# Altium PCB PCB1.PcbDoc (part 1 of 6)
Units mil, origin at the board's own origin, x right, y up, seen from the top; angles counter-clockwise.
Board outline 7480.32 x 4921.26 mil, 4 copper layers (Top Layer, GND, POWER, Bottom Layer), stack 23.756 mil thick; 513 components, 387 nets, 1792 pads, 594 vias.
Unrouted connection lines stored in the file: 21.
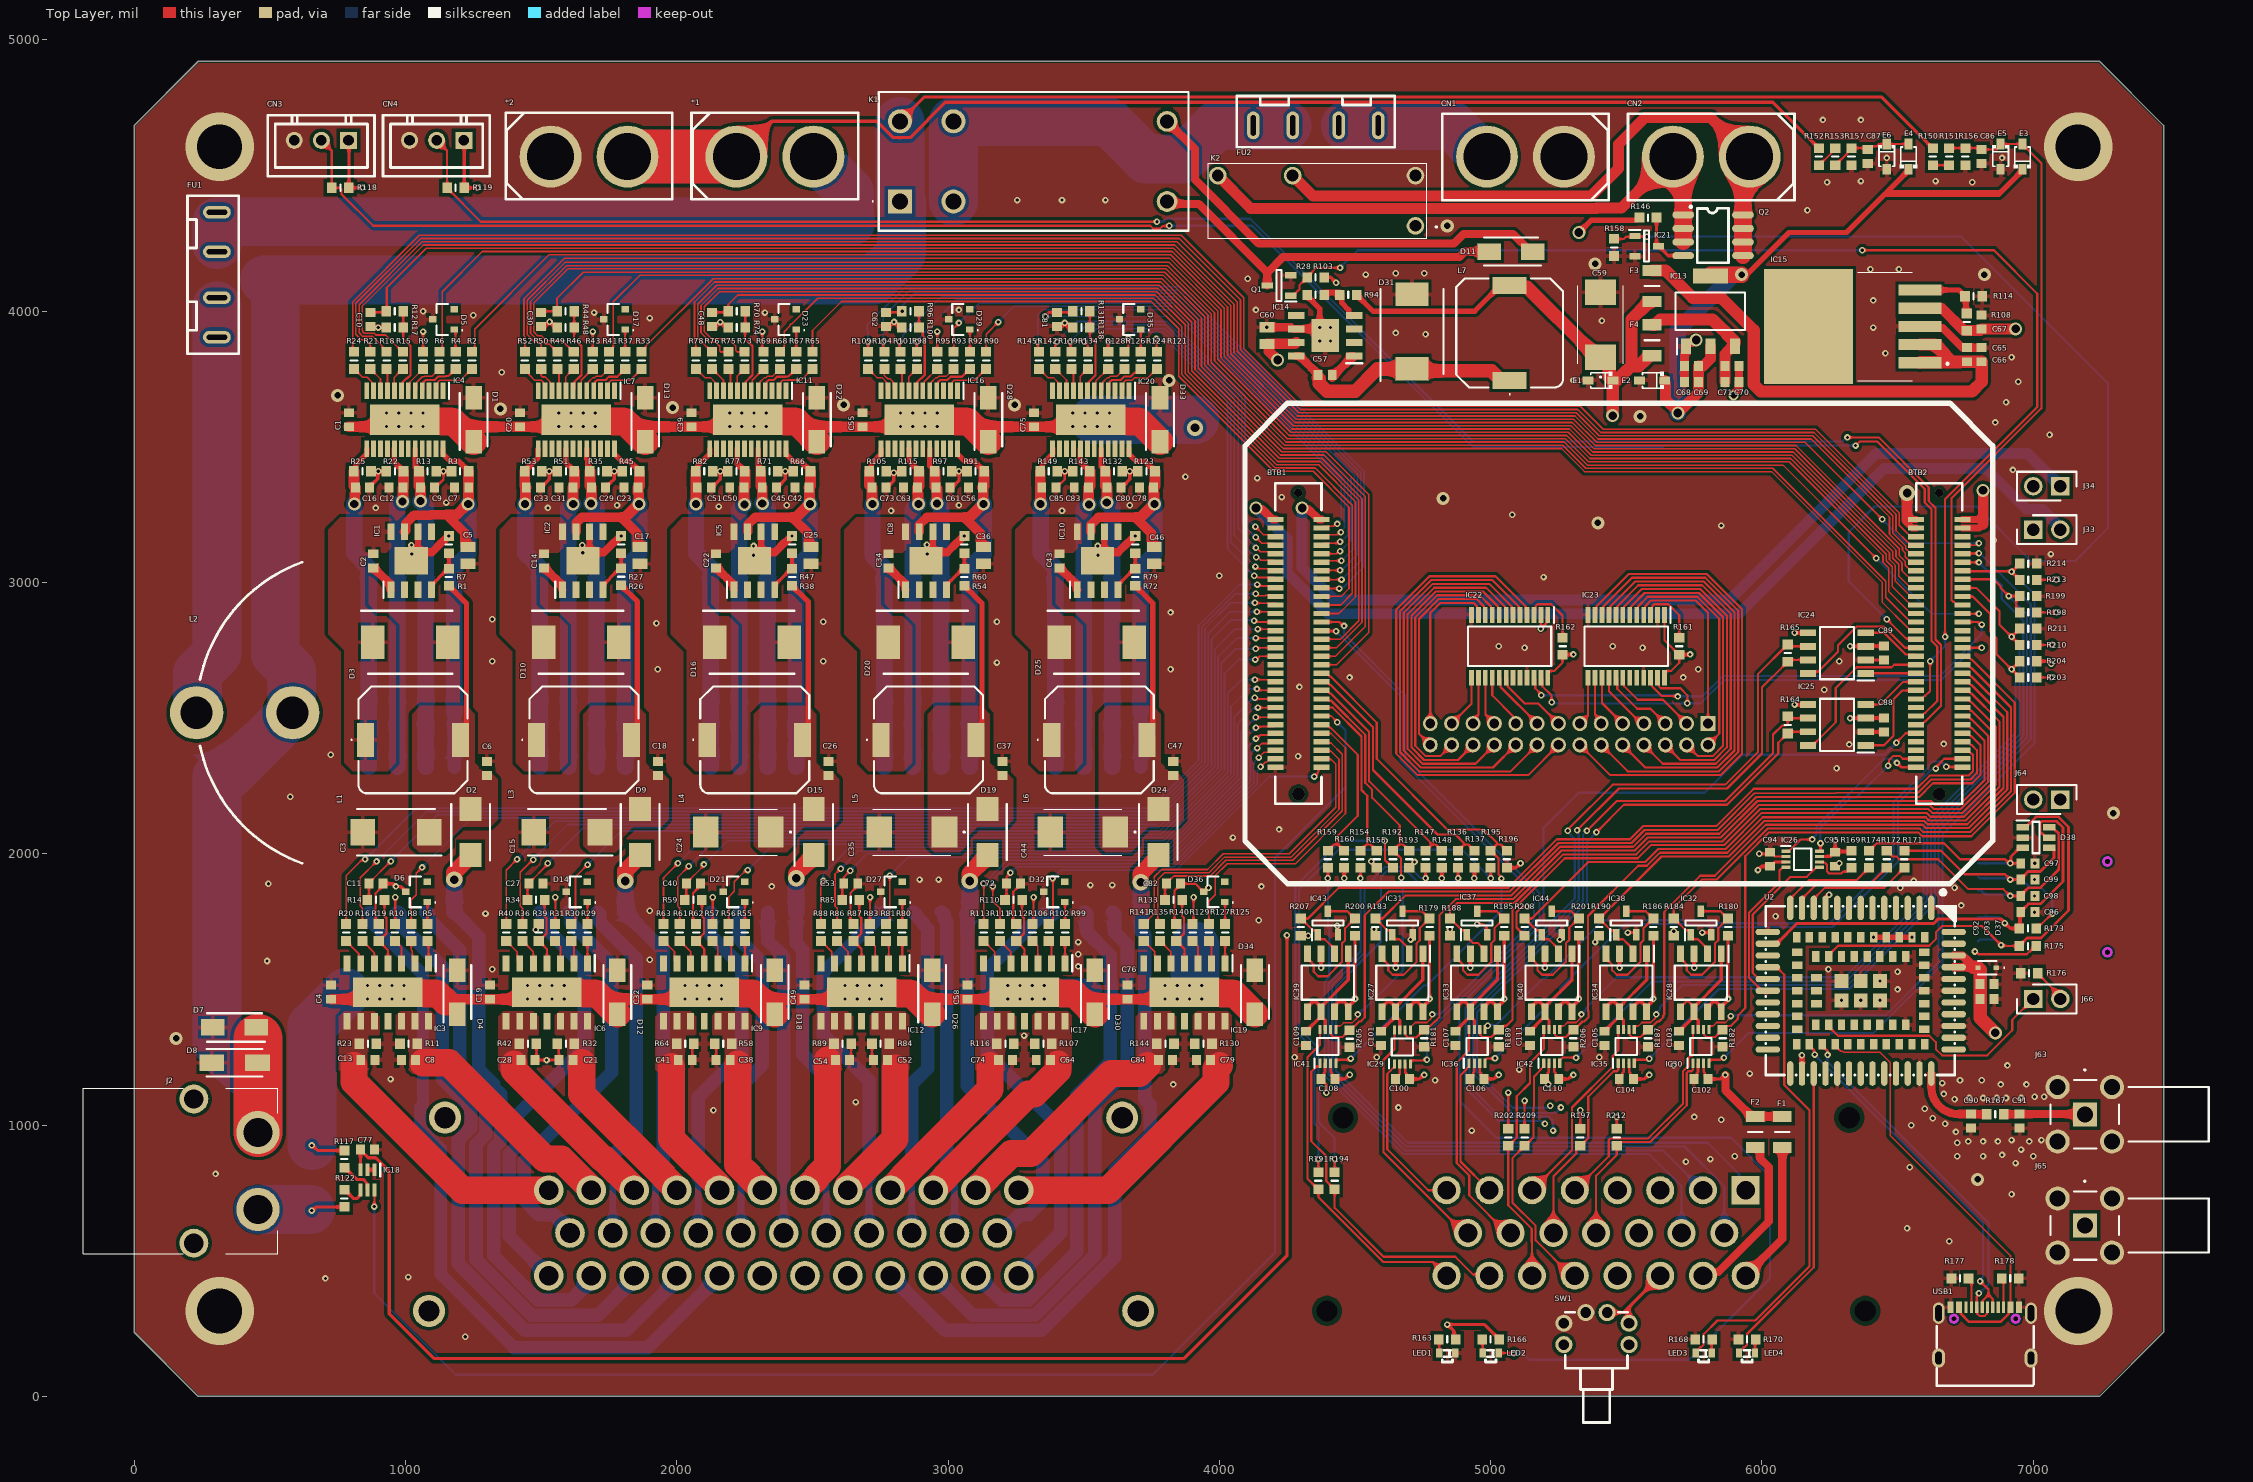
[diagram p0: Top Layer view]
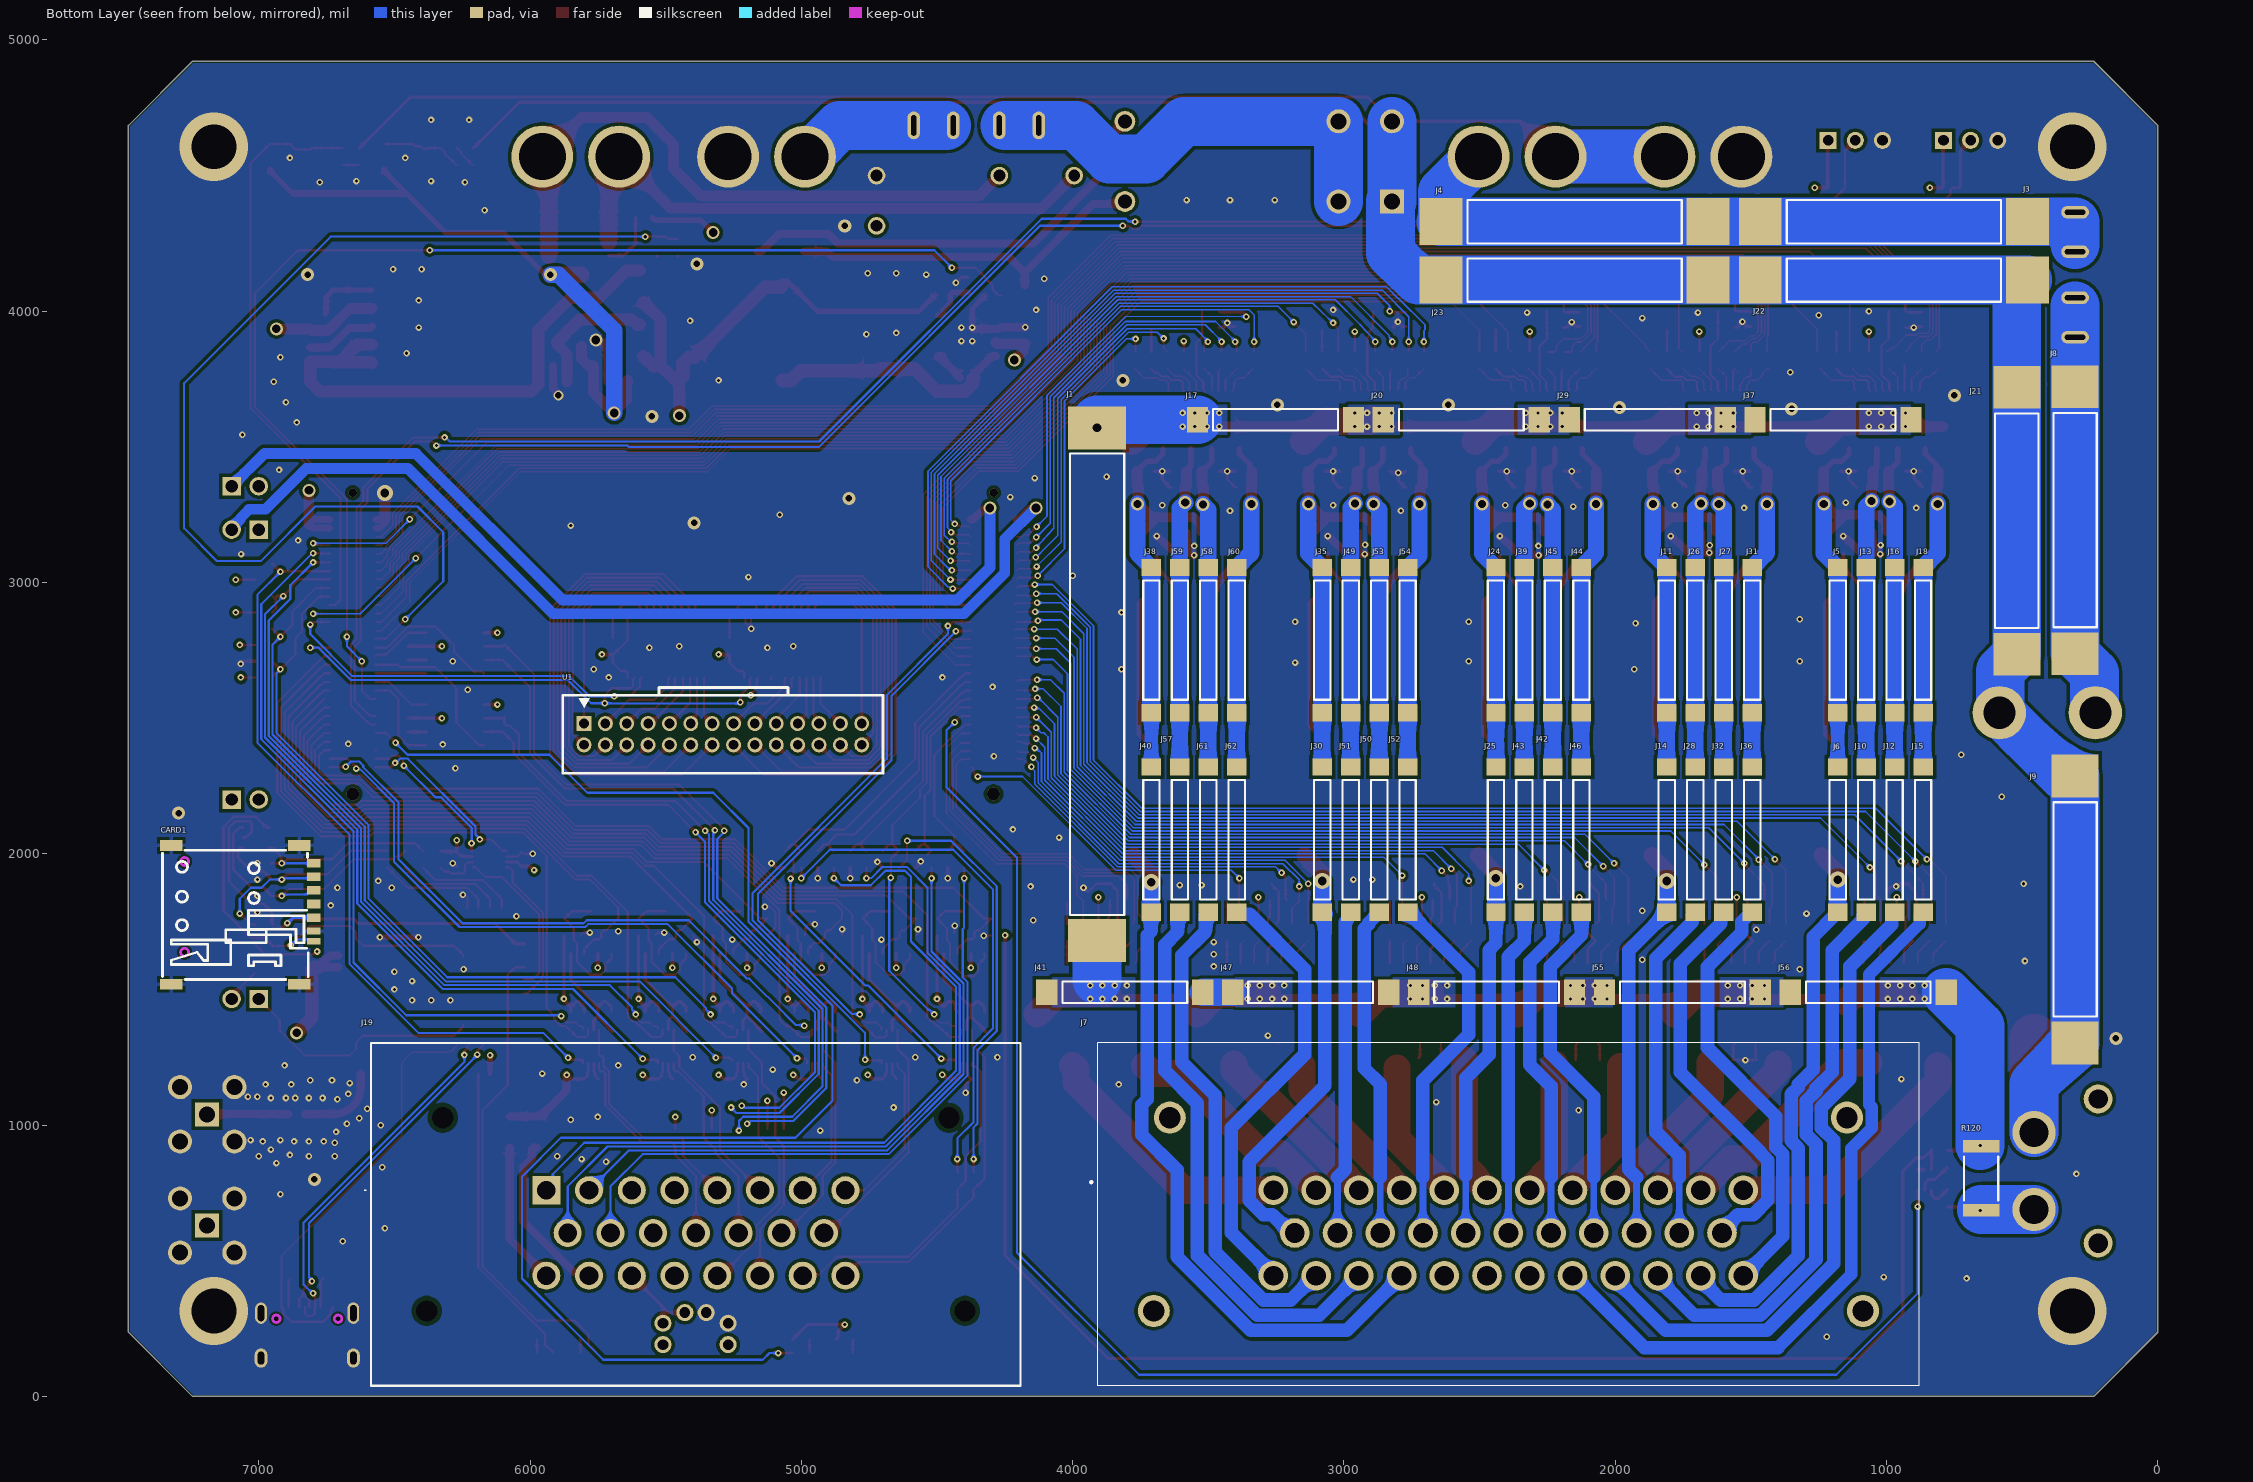
[diagram p1: Bottom Layer view, seen from below]
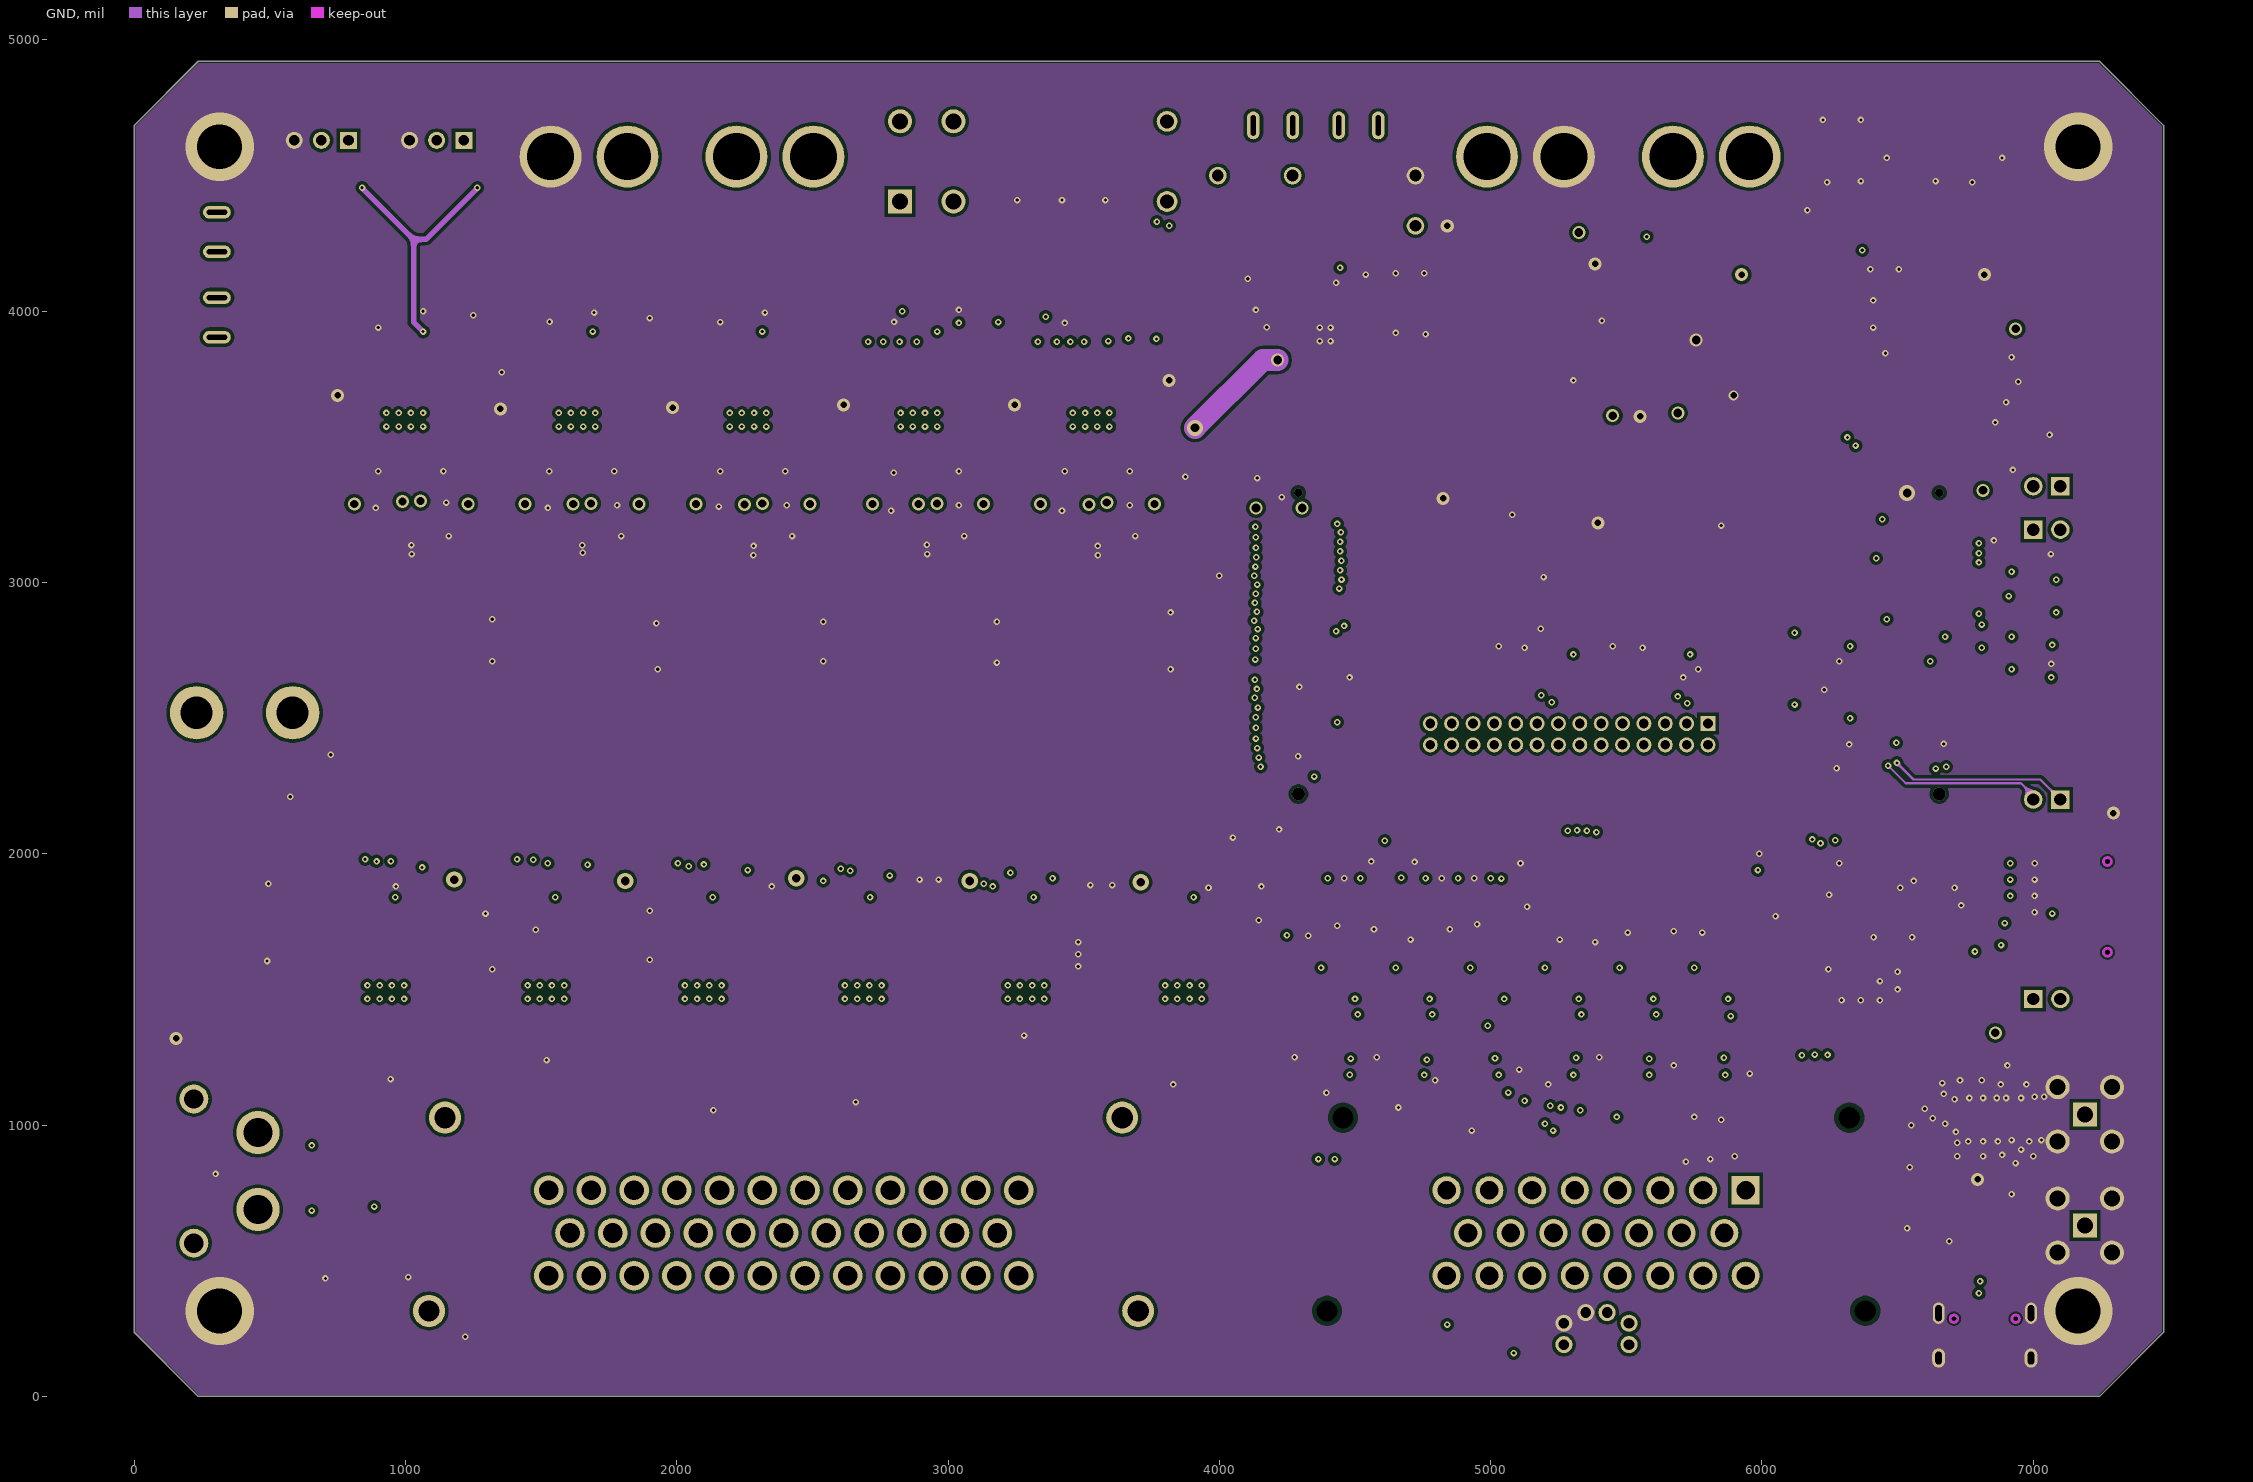
[diagram p2: GND]
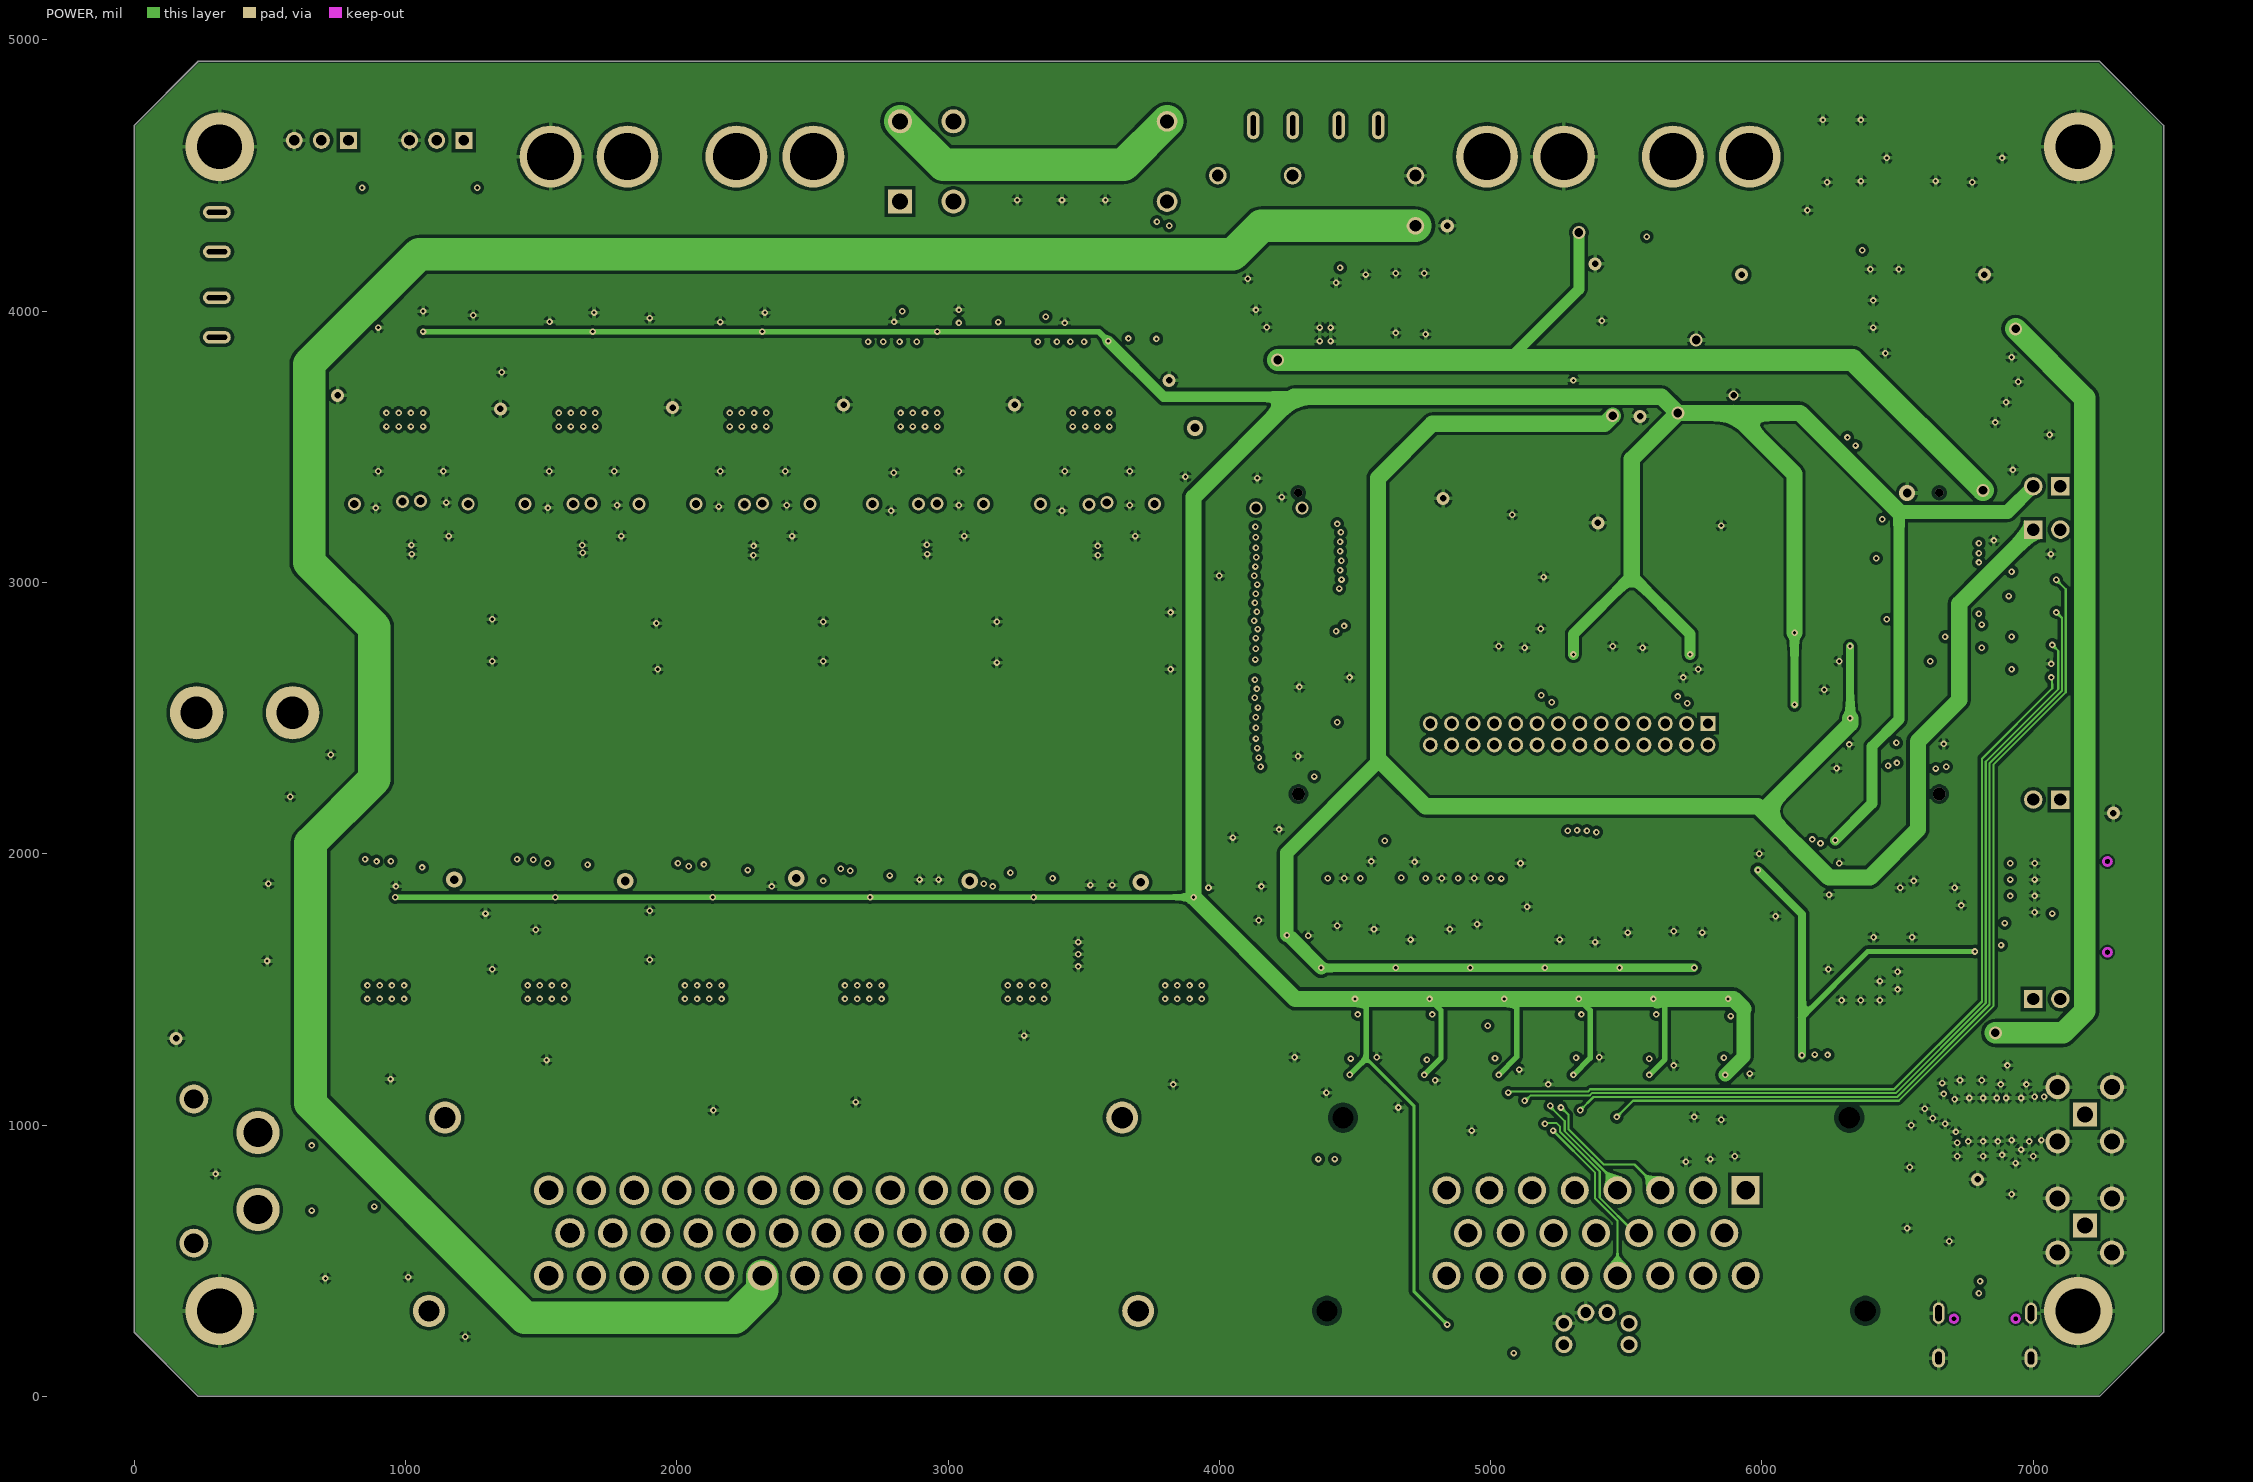
[diagram p3: POWER]
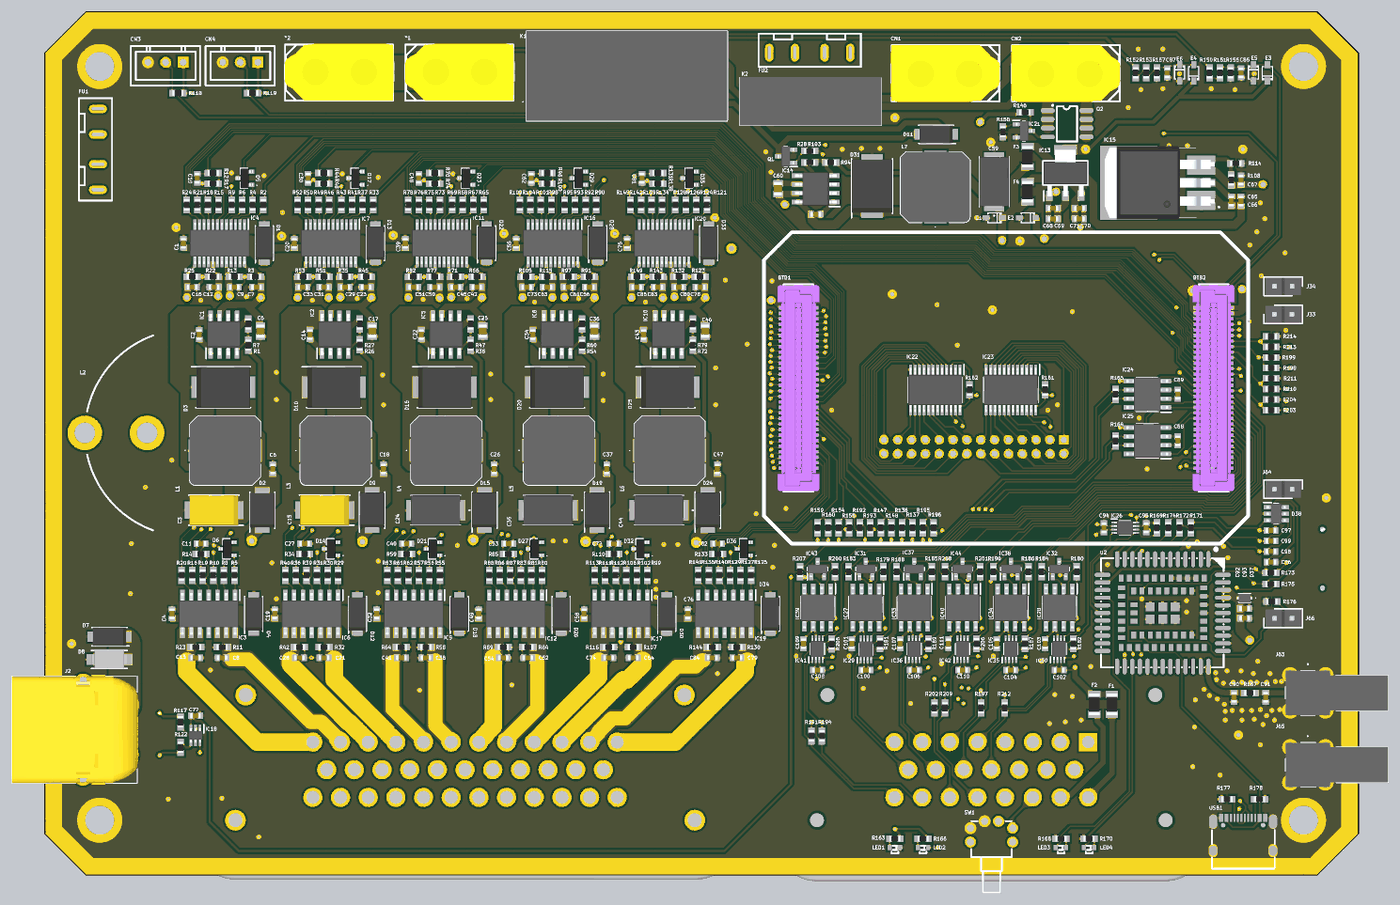
[diagram p8: 3D render of the assembled board from above, using the file's embedded part models]

## Layer stack, top to bottom
Top Solder: solder mask 0.4, Solder Resist, Dk 3.5
Top Layer: signal copper 1.4
Dielectric 2: prepreg 2.8, PP-006, Dk 4.1
GND: signal copper 1.378
Dielectric 1: dielectric 12.6, FR-4, Dk 4.8
POWER: signal copper 1.378
Dielectric 3: prepreg 2.8, PP-006, Dk 4.1
Bottom Layer: signal copper 1.4
Bottom Solder: solder mask 0.4, Solder Resist, Dk 3.5

## Board outline
0,236.22 0,4685.04 236.22,4921.26 7244.09,4921.26 7480.32,4685.04 7480.32,236.22 7244.09,0 236.22,0

## Design rules (kind name [scope] priority, off if disabled: settings)
AcuteAngle [All] p1: minimum=3.00000000000000E+0001 checktracksonly=TRUE
AssemblyTestPointUsage [All] p1 off:
AssemblyTestpoint [All] p1 off: testpointundercomponent=TRUE minsize=40 maxsize=100 preferedsize=60 minholesize=0 maxholesize=40 preferedholesize=32 testpointgrid=1 usegrid=TRUE gridtolerance=0.01 allowsidetop=TRUE allowsidebottom=TRUE
BoardOutlineClearance [All] p1: gap=6 ignorepadtopadclearanceinfootprint=FALSE
Clearance ClearanceOvRide [InComponentClass('NetTie') vs InComponentClass('NetTie')] p1: gap=12 ignorepadtopadclearanceinfootprint=TRUE except(6: Arc-Arc Arc-Track Arc-SMDPad Track-Track Track-SMDPad SMDPad-SMDPad; 10: Arc-THPad Arc-Via Track-THPad Track-Via SMDPad-THPad SMDPad-Via THPad-THPad THPad-Via Via-Via)
Clearance KeepoutOvRide [IsKeepOut vs InComponentClass('Opto')] p2: gap=0 ignorepadtopadclearanceinfootprint=TRUE
Clearance UnplatedHoleClearanceOvRide [(HoleDiameter > 0) And (PadIsPlated = 'False') AND (HoleDiameter >= PadYSize_AllLayers)] p3: gap=11.81 ignorepadtopadclearanceinfootprint=FALSE except(15.75: Arc-Hole Track-Hole SMDPad-Hole THPad-Hole Via-Hole Fill-Hole Poly-Hole Region-Hole Text-Hole)
Clearance IPC,500V,Polymer,uncoatedLead [InNetClass('450vNet')] p4: gap=59.06 ignorepadtopadclearanceinfootprint=FALSE except(11.81: Arc-Hole Track-Hole SMDPad-Hole THPad-Hole Via-Hole Fill-Hole Poly-Hole Region-Hole Text-Hole; 39.37: Arc-Arc Arc-Track Track-Track)
Clearance PowerTrace25mil [(InNetClass('PowerNet'))] p5: gap=25 ignorepadtopadclearanceinfootprint=FALSE except(6: Arc-Arc Arc-Track Arc-SMDPad Track-Track Track-SMDPad SMDPad-SMDPad; 10: Arc-THPad Arc-Via Track-THPad Track-Via SMDPad-THPad SMDPad-Via THPad-THPad THPad-Via Via-Via; 12: Arc-Text Arc-Hole Track-Text Track-Hole SMDPad-Text SMDPad-Hole THPad-Text THPad-Hole Via-Text Via-Hole Fill-Text Fill-Hole Poly-Text Poly-Hole Region-Text Region-Hole Text-Text Text-Hole)
Clearance 450V_Clearance [InNetClass('450vNet')] p6 off: gap=125.98 ignorepadtopadclearanceinfootprint=TRUE
Clearance [All] p7: gap=12 ignorepadtopadclearanceinfootprint=TRUE except(6: Arc-Arc Arc-Track Arc-SMDPad Track-Track Track-SMDPad SMDPad-SMDPad; 10: Arc-THPad Arc-Via Track-THPad Track-Via SMDPad-THPad SMDPad-Via THPad-THPad THPad-Via Via-Via)
ComponentClearance ComponentOvRide [IsNetTieComponent] p1: gap=0 collisioncheckmode=3 verticalgap=10 showdistances=FALSE
ComponentClearance "450V clearance" [InComponentClass('450vPart')] p2: gap=59.06 collisioncheckmode=3 verticalgap=100000 showdistances=FALSE
ComponentClearance [All] p3: gap=12 collisioncheckmode=3 verticalgap=10 showdistances=FALSE
Creepage CreepageOvRide [InComponentClass('NetTie') vs InComponentClass('NetTie')] p1: checkdistance=0.01
Creepage 450V_Creepage [InNetClass('450vNet') vs InNetClass('All Nets')] p2 off: checkdistance=181.1 ignoreinternallayers=FALSE
Creepage [All] p3: checkdistance=5.12
FabricationTestPointUsage [All] p1 off: valid=0 allowmultiple=FALSE
FabricationTestpoint [All] p1 off: side=3 testpointundercomponent=TRUE minsize=40 maxsize=100 preferedsize=60 minholesize=0 maxholesize=40 preferedholesize=32 testpointgrid=1 allowsidetop=TRUE allowsidebottom=TRUE usegrid=TRUE gridtolerance=0.01
Height [All] p1: minheight=0 maxheight=1574.8 prefheight=500
HoleSize HoleSizeOvRide [(HoleDiameter > 0) And (PadIsPlated = 'False') AND (HoleDiameter >= PadYSize_AllLayers)] p1: absolutevalues=TRUE maxlimit=39330.71 minlimit=7.87 maxpercent=80.000 minpercent=20.000
HoleSize [All] p2: absolutevalues=TRUE maxlimit=236.22 minlimit=7.87 maxpercent=80.000 minpercent=20.000
HoleToHoleClearance SlotOvRide [All vs (HoleDiameter > 0) And (PadIsPlated = 'False') AND (HoleDiameter >= PadYSize_AllLayers)] p1: gap=0 allowstackedmicrovias=TRUE
HoleToHoleClearance [All] p2: gap=10 allowstackedmicrovias=TRUE
MinimumAnnularRing PadMinimumAnnularRing [NOT IsVia] p1: minimumring=6
MinimumAnnularRing ViaAnnularRing [All] p2: minimumring=6
MinimumSolderMaskSliver [All] p1: minsoldermaskwidth=3
PolygonConnect PolygonConnect_47 [All vs IsNamedPolygon('Bottom')] p1: thpad.connectstyle=Direct thpad.reliefconductorwidth=10 thpad.reliefentries=4 thpad.polygonreliefangle="90 Angle" thpad.airgapwidth=10 smdpad.connectstyle=Relief smdpad.reliefconductorwidth=15 smdpad.reliefentries=4 smdpad.polygonreliefangle="90 Angle" smdpad.airgapwidth=10 via.connectstyle=Direct via.reliefconductorwidth=10 via.reliefentries=4 via.polygonreliefangle="90 Angle" via.airgapwidth=10
PolygonConnect PolygonConnect_46 [All vs IsNamedPolygon('gnd')] p2: thpad.connectstyle=Direct thpad.reliefconductorwidth=10 thpad.reliefentries=4 thpad.polygonreliefangle="90 Angle" thpad.airgapwidth=10 smdpad.connectstyle=Relief smdpad.reliefconductorwidth=15 smdpad.reliefentries=4 smdpad.polygonreliefangle="90 Angle" smdpad.airgapwidth=10 via.connectstyle=Direct via.reliefconductorwidth=10 via.reliefentries=4 via.polygonreliefangle="90 Angle" via.airgapwidth=10
PolygonConnect PolygonConnect_45 [All vs IsNamedPolygon('Top')] p3: thpad.connectstyle=Direct thpad.reliefconductorwidth=10 thpad.reliefentries=4 thpad.polygonreliefangle="90 Angle" thpad.airgapwidth=10 smdpad.connectstyle=Relief smdpad.reliefconductorwidth=15 smdpad.reliefentries=4 smdpad.polygonreliefangle="90 Angle" smdpad.airgapwidth=10 via.connectstyle=Direct via.reliefconductorwidth=10 via.reliefentries=4 via.polygonreliefangle="90 Angle" via.airgapwidth=10
PolygonConnect PolygonConnect_44 [All vs IsNamedPolygon('NONET_L04_P037')] p4: connectstyle=Direct reliefconductorwidth=10 reliefentries=4 polygonreliefangle="90 Angle" airgapwidth=10
PolygonConnect PolygonConnect_43 [All vs IsNamedPolygon('NONET_L04_P036')] p5: connectstyle=Direct reliefconductorwidth=10 reliefentries=4 polygonreliefangle="90 Angle" airgapwidth=10
PolygonConnect PolygonConnect_42 [All vs IsNamedPolygon('NONET_L04_P035')] p6: connectstyle=Direct reliefconductorwidth=10 reliefentries=4 polygonreliefangle="90 Angle" airgapwidth=10
PolygonConnect PolygonConnect_41 [All vs IsNamedPolygon('NONET_L04_P034')] p7: connectstyle=Direct reliefconductorwidth=10 reliefentries=4 polygonreliefangle="90 Angle" airgapwidth=10
PolygonConnect PolygonConnect_40 [All vs IsNamedPolygon('NONET_L04_P033')] p8: connectstyle=Direct reliefconductorwidth=10 reliefentries=4 polygonreliefangle="90 Angle" airgapwidth=10
PolygonConnect PolygonConnect_39 [All vs IsNamedPolygon('NONET_L04_P032')] p9: connectstyle=Direct reliefconductorwidth=10 reliefentries=4 polygonreliefangle="90 Angle" airgapwidth=10
PolygonConnect PolygonConnect_38 [All vs IsNamedPolygon('NONET_L04_P031')] p10: connectstyle=Direct reliefconductorwidth=10 reliefentries=4 polygonreliefangle="90 Angle" airgapwidth=10
PolygonConnect PolygonConnect_37 [All vs IsNamedPolygon('NONET_L04_P030')] p11: connectstyle=Direct reliefconductorwidth=10 reliefentries=4 polygonreliefangle="90 Angle" airgapwidth=10
PolygonConnect PolygonConnect_36 [All vs IsNamedPolygon('NONET_L04_P029')] p12: connectstyle=Direct reliefconductorwidth=10 reliefentries=4 polygonreliefangle="90 Angle" airgapwidth=10
PolygonConnect PolygonConnect_35 [All vs IsNamedPolygon('NONET_L04_P028')] p13: connectstyle=Direct reliefconductorwidth=10 reliefentries=4 polygonreliefangle="90 Angle" airgapwidth=10
PolygonConnect PolygonConnect_34 [All vs IsNamedPolygon('NONET_L04_P027')] p14: connectstyle=Direct reliefconductorwidth=10 reliefentries=4 polygonreliefangle="90 Angle" airgapwidth=10
PolygonConnect PolygonConnect_33 [All vs IsNamedPolygon('NONET_L01_P026')] p15: connectstyle=Direct reliefconductorwidth=10 reliefentries=4 polygonreliefangle="90 Angle" airgapwidth=10
PolygonConnect PolygonConnect_32 [All vs IsNamedPolygon('NONET_L01_P025')] p16: connectstyle=Direct reliefconductorwidth=10 reliefentries=4 polygonreliefangle="90 Angle" airgapwidth=10
PolygonConnect PolygonConnect_31 [All vs IsNamedPolygon('NONET_L01_P024')] p17: connectstyle=Direct reliefconductorwidth=10 reliefentries=4 polygonreliefangle="90 Angle" airgapwidth=10
PolygonConnect PolygonConnect_30 [All vs IsNamedPolygon('NONET_L01_P023')] p18: connectstyle=Direct reliefconductorwidth=10 reliefentries=4 polygonreliefangle="90 Angle" airgapwidth=10
PolygonConnect PolygonConnect_29 [All vs IsNamedPolygon('NONET_L01_P022')] p19: connectstyle=Direct reliefconductorwidth=10 reliefentries=4 polygonreliefangle="90 Angle" airgapwidth=10
PolygonConnect PolygonConnect_28 [All vs IsNamedPolygon('NONET_L01_P020')] p20: connectstyle=Direct reliefconductorwidth=10 reliefentries=4 polygonreliefangle="90 Angle" airgapwidth=10
PolygonConnect PolygonConnect_27 [All vs IsNamedPolygon('NONET_L01_P019')] p21: connectstyle=Direct reliefconductorwidth=10 reliefentries=4 polygonreliefangle="90 Angle" airgapwidth=10
PolygonConnect PolygonConnect_26 [All vs IsNamedPolygon('NONET_L01_P018')] p22: connectstyle=Direct reliefconductorwidth=10 reliefentries=4 polygonreliefangle="90 Angle" airgapwidth=10
PolygonConnect PolygonConnect_25 [All vs IsNamedPolygon('NONET_L01_P017')] p23: connectstyle=Direct reliefconductorwidth=10 reliefentries=4 polygonreliefangle="90 Angle" airgapwidth=10
PolygonConnect PolygonConnect_24 [All vs IsNamedPolygon('NONET_L01_P016')] p24: connectstyle=Direct reliefconductorwidth=10 reliefentries=4 polygonreliefangle="90 Angle" airgapwidth=10
PolygonConnect PolygonConnect_23 [All vs IsNamedPolygon('NETC3_1_L01_P013')] p25: connectstyle=Direct reliefconductorwidth=10 reliefentries=4 polygonreliefangle="90 Angle" airgapwidth=10
PolygonConnect PolygonConnect_22 [All vs IsNamedPolygon('NONET_L01_P006')] p26: connectstyle=Direct reliefconductorwidth=10 reliefentries=4 polygonreliefangle="90 Angle" airgapwidth=10
PolygonConnect PolygonConnect_21 [All vs IsNamedPolygon('NONET_L01_P011')] p27: connectstyle=Direct reliefconductorwidth=10 reliefentries=4 polygonreliefangle="90 Angle" airgapwidth=10
PolygonConnect PolygonConnect_20 [All vs IsNamedPolygon('NONET_L01_P005')] p28: connectstyle=Direct reliefconductorwidth=10 reliefentries=4 polygonreliefangle="90 Angle" airgapwidth=10
PolygonConnect PolygonConnect_19 [All vs IsNamedPolygon('NONET_L01_P010')] p29: connectstyle=Direct reliefconductorwidth=10 reliefentries=4 polygonreliefangle="90 Angle" airgapwidth=10
PolygonConnect PolygonConnect_18 [All vs IsNamedPolygon('NONET_L01_P004')] p30: connectstyle=Direct reliefconductorwidth=10 reliefentries=4 polygonreliefangle="90 Angle" airgapwidth=10
PolygonConnect PolygonConnect_17 [All vs IsNamedPolygon('NONET_L01_P009')] p31: connectstyle=Direct reliefconductorwidth=10 reliefentries=4 polygonreliefangle="90 Angle" airgapwidth=10
PolygonConnect PolygonConnect_16 [All vs IsNamedPolygon('NONET_L01_P003')] p32: connectstyle=Direct reliefconductorwidth=10 reliefentries=4 polygonreliefangle="90 Angle" airgapwidth=10
PolygonConnect PolygonConnect_15 [All vs IsNamedPolygon('NONET_L01_P008')] p33: connectstyle=Direct reliefconductorwidth=10 reliefentries=4 polygonreliefangle="90 Angle" airgapwidth=10
PolygonConnect PolygonConnect_14 [All vs IsNamedPolygon('NONET_L01_P002')] p34: connectstyle=Direct reliefconductorwidth=10 reliefentries=4 polygonreliefangle="90 Angle" airgapwidth=10
PolygonConnect PolygonConnect_13 [All vs IsNamedPolygon('NONET_L01_P007')] p35: connectstyle=Direct reliefconductorwidth=10 reliefentries=4 polygonreliefangle="90 Angle" airgapwidth=10
PolygonConnect PolygonConnect_12 [All vs IsNamedPolygon('NONET_L01_P000')] p36: connectstyle=Direct reliefconductorwidth=10 reliefentries=4 polygonreliefangle="90 Angle" airgapwidth=10
PolygonConnect PolygonConnect_11 [All vs IsNamedPolygon('NONET_L01_P001')] p37: connectstyle=Direct reliefconductorwidth=10 reliefentries=4 polygonreliefangle="90 Angle" airgapwidth=10
PolygonConnect PolygonConnect_10 [All vs IsNamedPolygon('GND_L06_P017')] p38: thpad.connectstyle=Relief thpad.reliefconductorwidth=10 thpad.reliefentries=4 thpad.polygonreliefangle="90 Angle" thpad.airgapwidth=10 smdpad.connectstyle=Relief smdpad.reliefconductorwidth=10 smdpad.reliefentries=4 smdpad.polygonreliefangle="90 Angle" smdpad.airgapwidth=10 via.connectstyle=Direct via.reliefconductorwidth=10 via.reliefentries=4 via.polygonreliefangle="90 Angle" via.airgapwidth=10
PolygonConnect PolygonConnect_9 [All vs IsNamedPolygon('GND_L05_P012')] p39: thpad.connectstyle=Relief thpad.reliefconductorwidth=15 thpad.reliefentries=4 thpad.polygonreliefangle="90 Angle" thpad.airgapwidth=10 smdpad.connectstyle=Relief smdpad.reliefconductorwidth=15 smdpad.reliefentries=4 smdpad.polygonreliefangle="90 Angle" smdpad.airgapwidth=10 via.connectstyle=Direct via.reliefconductorwidth=15 via.reliefentries=4 via.polygonreliefangle="90 Angle" via.airgapwidth=10
PolygonConnect PolygonConnect_8 [All vs IsNamedPolygon('GND_L02_P011')] p40: thpad.connectstyle=Relief thpad.reliefconductorwidth=15 thpad.reliefentries=4 thpad.polygonreliefangle="90 Angle" thpad.airgapwidth=10 smdpad.connectstyle=Relief smdpad.reliefconductorwidth=15 smdpad.reliefentries=4 smdpad.polygonreliefangle="90 Angle" smdpad.airgapwidth=10 via.connectstyle=Direct via.reliefconductorwidth=15 via.reliefentries=4 via.polygonreliefangle="90 Angle" via.airgapwidth=10
PolygonConnect PolygonConnect_7 [All vs IsNamedPolygon('GND_L01_P013')] p41: thpad.connectstyle=Relief thpad.reliefconductorwidth=15 thpad.reliefentries=4 thpad.polygonreliefangle="90 Angle" thpad.airgapwidth=10 smdpad.connectstyle=Relief smdpad.reliefconductorwidth=15 smdpad.reliefentries=4 smdpad.polygonreliefangle="90 Angle" smdpad.airgapwidth=10 via.connectstyle=Direct via.reliefconductorwidth=15 via.reliefentries=4 via.polygonreliefangle="90 Angle" via.airgapwidth=10
PolygonConnect PolygonConnect_6 [All vs IsNamedPolygon('NETIC2_47_L01_P009')] p42: connectstyle=Direct reliefconductorwidth=10 reliefentries=4 polygonreliefangle="90 Angle" airgapwidth=10
PolygonConnect PolygonConnect_5 [All vs IsNamedPolygon('NETIC2_34_L01_P010')] p43: connectstyle=Direct reliefconductorwidth=10 reliefentries=4 polygonreliefangle="90 Angle" airgapwidth=10
PolygonConnect PolygonConnect_4 [All vs IsNamedPolygon('NETD3_2_L01_P000')] p44: connectstyle=Direct reliefconductorwidth=10 reliefentries=4 polygonreliefangle="90 Angle" airgapwidth=10
PolygonConnect PolygonConnect_3 [All vs IsNamedPolygon('NETD1_2_L01_P005')] p45: connectstyle=Direct reliefconductorwidth=10 reliefentries=4 polygonreliefangle="90 Angle" airgapwidth=10
PolygonConnect PolygonConnect_2 [All vs IsNamedPolygon('NETC7_1_L01_P004')] p46: connectstyle=Direct reliefconductorwidth=10 reliefentries=4 polygonreliefangle="90 Angle" airgapwidth=10
PolygonConnect PolygonConnect_1 [All vs IsNamedPolygon('NETC6_1_L01_P007')] p47: connectstyle=Direct reliefconductorwidth=10 reliefentries=4 polygonreliefangle="90 Angle" airgapwidth=10
PolygonConnect [All] p48: connectstyle=Relief reliefconductorwidth=15 reliefentries=4 polygonreliefangle="90 Angle" airgapwidth=10
RoutingVias [All] p1: holewidth=11.81 width=787.4 viastyle="Through Hole" minholewidth=7.48 minwidth=16 maxholewidth=78.74 maxwidth=120
SMDEntry [All] p1 off: side=TRUE corner=TRUE anyangle=FALSE
SMDToCorner [All] p1 off: distance=30000
ShortCircuit ShortCircuitOvRide [InComponentClass('NetTie') OR((HoleDiameter > 0) And (PadIsPlated = 'False') AND (HoleDiameter >= PadYSize_AllLayers)) vs InComponentClass('NetTie') OR ((HoleDiameter > 0) And (PadIsPlated = 'False') AND (HoleDiameter >= PadYSize_AllLayers))] p1: allowed=TRUE
ShortCircuit [All] p2: allowed=FALSE
SilkToSilkClearance [All] p1: silktosilkclearance=1
SilkToSolderMaskClearance [IsPad] p1: minsilkscreentomaskgap=0 clearancetoexposedcopper=TRUE
SolderMaskExpansion [All] p1: expansion=2 istentingtop=FALSE
UnRoutedNet [All] p1: checkbadconnections=TRUE
Width [All] p1: maxlimit=200 minlimit=4 preferedwidth=10
17 further rules are at their usual default settings.

## Classes and differential pairs
component class Sheet4: C100 C101 C102 C103 C104 C105 C106 C107 C108 C109 C110 C111 IC27 IC28 IC29 IC30 IC31 IC32 IC33 IC34 IC35 IC36 IC37 IC38 IC39 IC40 IC41 IC42 IC43 IC44 R179 R180 R181 R182 R183 R184 R185 R186 R187 R188 R189 R190 R191 R192 R193 R194 R195 R196 R197 R198 R199 R200 R201 R202 R203 R204 R205 R206 R207 R208 R209 R210 R211 R212 R213 R214
component class Sheet2: C90 C91 C92 C93 C94 C95 C96 C97 C98 C99 CARD1 D37 D38 IC26 J63 J64 J65 J66 LED3 LED4 R167 R168 R169 R170 R171 R172 R173 R174 R175 R176 R177 R178 U2 USB1
component class Sheet1: *1 *2 BTB1 BTB2 C1 C2 C3 C4 C5 C6 C7 C8 C9 C10 C11 C12 C13 C14 C15 C16 C17 C18 C19 C20 C21 C22 C23 C24 C25 C26 C27 C28 C29 C30 C31 C32 C33 C34 C35 C36 C37 C38 C39 C40 C41 C42 C43 C44 C45 C46 C47 C48 C49 C50 C51 C52 C53 C54 C55 C56 C57 C58 C59 C60 C61 C62 C63 C64 C65 C66 C67 C68 C69 C70 C71 C72 C73 C74 C75 C76 C77 C78 C79 C80 C81 C82 C83 C84 C85 C86 C87 C88 C89 CN1 CN2 CN3 CN4 D1 D2 D3 D4 D5 D6 D7 D8 D9 D10 D11 D12 D13 D14 D15 D16 D17 D18 D19 D20 D21 D22 D23 D24 D25 D26 D27 D28 D29 D30 D31 D32 D33 D34 D35 D36 E1 E2 E3 E4 E5 E6 F1 F2 F3 F4 FU1 FU2 IC1 IC2 IC3 IC4 IC5 IC6 IC7 IC8 IC9 IC10 IC11 IC12 IC13 IC14 IC15 IC16 IC17 IC18 IC19 IC20 IC21 IC22 IC23 IC24 IC25 J1 J2 J3 J4 J5 J6 J7 J8 J9 J10 J11 J12 J13 J14 J15 J16 J17 J18 J19 J20 J21 J22 J23 J24 J25 J26 J27 J28 J29 J30 J31 J32 J33 J34 J35 J36 J37 J38 J39 J40 J41 J42 J43 J44 J45 J46 J47 J48 J49 J50 J51 J52 J53 J54 J55 J56 J57 J58 J59 J60 J61 J62 K1 K2 L1 L2 L3 L4 L5 L6 L7 LED1 LED2 Q1 Q2 R1 R2 R3 R4 R5 R6 R7 R8 R9 R10 R11 R12 R13 R14 R15 R16 R17 R18 R19 R20 R21 R22 R23 R24 R25 R26 R27 R28 R29 R30 R31 R32 R33 R34 R35 R36 R37 R38 R39 R40 R41 R42 R43 R44 R45 R46 R47 R48 R49 R50 R51 R52 R53 R54 R55 R56 R57 R58 R59 R60 R61 R62 R63 R64 R65 R66 R67 R68 R69 R70 R71 R72 R73 R74 R75 R76 R77 R78 R79 R80 R81 R82 R83 R84 R85 R86 R87 R88 R89 R90 R91 R92 R93 R94 R95 R96 R97 R98 R99 R100 R101 R102 R103 R104 R105 R106 R107 R108 R109 R110 R111 R112 R113 R114 R115 R116 R117 R118 R119 R120 R121 R122 R123 R124 R125 R126 R127 R128 R129 R130 R131 R132 R133 R134 R135 R136 R137 R138 R139 R140 R141 R142 R143 R144 R145 R146 R147 R148 R149 R150 R151 R152 R153 R154 R155 R156 R157 R158 R159 R160 R161 R162 R163 R164 R165 R166 SW1 U1

## Components (designator, comment, footprint, x,y, rotation, side; value= is the part's Value field where it differs from the comment)
*1 "XT60-NOMAL" AMASS_XT60_NOMAL 2220,4570 r0 top
*2 "XT60-NOMAL" AMASS_XT60_NOMAL 1535,4570 r0 top
BTB1 "BTB_0.8mm_60Pin_Mother" BTB_0.8MM_60PIN_M 4291.34,2775.59 r180 top
BTB2 "BTB_0.8mm_60Pin_Mother" BTB_0.8MM_60PIN_M 6653.54,2775.59 r180 top
C1 "100nF" CAPC1608X90N 791.26,3600 r90 top
C2 "10nF" CAPC1608X90N 881.26,3080 r90 top
C3 "TAJE337M016RNJ" CAPPM7344X430N 965,2080 r180 top
C4 "100nF" CAPC1608X90N 726.26,1490 r90 top
C5 "22uF" CAPC2012X95N 1230,3100 r90 top
C6 "100nF" CAPC1608X90N 1300,2315 r270 top
C7 "10nF" CAPC1608X90N 1207.24,3350 r0 top
C8 "10nF" CAPC1608X90N 1011.26,1240 r0 top
C9 "10nF" CAPC1608X90N 1081.26,3350 r180 top
C10 "100pF" CAPC1608X90N 870.28,3970 r90 top
C11 "100pF" CAPC1608X90N 891.26,1890 r180 top
C12 "10nF" CAPC1608X90N 965.28,3350 r0 top
C13 "10nF" CAPC1608X90N 861.26,1240 r180 top
C14 "10nF" CAPC1608X90N 1511.26,3080 r90 top
C15 "TAJE337M016RNJ" CAPPM7344X430N 1595,2080 r180 top
C16 "10nF" CAPC1608X90N 841.26,3350 r180 top
C17 "22uF" CAPC2012X95N 1865,3100 r90 top
C18 "100nF" CAPC1608X90N 1930,2315 r270 top
C19 "100nF" CAPC1608X90N 1311.26,1490 r90 top
C20 "100nF" CAPC1608X90N 1422.51,3600 r90 top
C21 "10nF" CAPC1608X90N 1591.26,1240 r0 top
C22 "10nF" CAPC1608X90N 2145,3080 r90 top
C23 "10nF" CAPC1608X90N 1831.26,3350 r0 top
C24 "10TPB330M" POSCAP_D12_D15_D15E_D2E_D2_D3L_D4 2226.55,2080 r180 top
C25 "22uF" CAPC2012X95N 2495,3100 r90 top
C26 "100nF" CAPC1608X90N 2560,2315 r270 top
C27 "100pF" CAPC1608X90N 1481.26,1890 r180 top
C28 "10nF" CAPC1608X90N 1451.26,1240 r180 top
C29 "10nF" CAPC1608X90N 1711.26,3350 r180 top
C30 "100pF" CAPC1608X90N 1500.28,3970 r90 top
C31 "10nF" CAPC1608X90N 1591.26,3350 r0 top
C32 "100nF" CAPC1608X90N 1891.26,1490 r90 top
C33 "10nF" CAPC1608X90N 1471.26,3350 r180 top
C34 "10nF" CAPC1608X90N 2780,3080 r90 top
C35 "10TPB330M" POSCAP_D12_D15_D15E_D2E_D2_D3L_D4 2866.55,2080 r180 top
C36 "22uF" CAPC2012X95N 3130,3100 r90 top
C37 "100nF" CAPC1608X90N 3200,2315 r270 top
C38 "10nF" CAPC1608X90N 2171.26,1240 r0 top
C39 "100nF" CAPC1608X90N 2053.76,3600 r90 top
C40 "100pF" CAPC1608X90N 2061.26,1890 r180 top
C41 "10nF" CAPC1608X90N 2031.26,1240 r180 top
C42 "10nF" CAPC1608X90N 2461.26,3350 r0 top
C43 "10nF" CAPC1608X90N 3410,3080 r90 top
C44 "10TPB330M" POSCAP_D12_D15_D15E_D2E_D2_D3L_D4 3496.55,2080 r180 top
C45 "10nF" CAPC1608X90N 2341.26,3350 r180 top
C46 "22uF" CAPC2012X95N 3760,3100 r90 top
C47 "100nF" CAPC1608X90N 3830,2315 r270 top
C48 "100pF" CAPC1608X90N 2130.28,3970 r90 top
C49 "100nF" CAPC1608X90N 2471.26,1490 r90 top
C50 "10nF" CAPC1608X90N 2221.26,3350 r0 top
C51 "10nF" CAPC1608X90N 2101.26,3350 r180 top
C52 "10nF" CAPC1608X90N 2751.26,1240 r0 top
C53 "100pF" CAPC1608X90N 2641.26,1890 r180 top
C54 "10nF" CAPC1608X90N 2611.26,1240 r180 top
C55 "100nF" CAPC1608X90N 2685.01,3600 r90 top
C56 "10nF" CAPC1608X90N 3101.26,3350 r0 top
C57 "10nF" CAPC1608X90N 4390,3765 r180 top
C58 "100nF" CAPC1608X90N 3071.26,1490 r90 top
C59 "10TPB330M" POSCAP_D12_D15_D15E_D2E_D2_D3L_D4 5405,3950 r90 top
C60 "22uF" CAPC2012X95N 4175,3910 r270 top
C61 "10nF" CAPC1608X90N 2981.26,3350 r180 top
C62 "100pF" CAPC1608X90N 2771.26,3970 r90 top
C63 "10nF" CAPC1608X90N 2861.26,3350 r0 top
C64 "10nF" CAPC1608X90N 3351.26,1240 r0 top
C65 "100nF" CAPC1608X90N 6755,3840 r270 top
C66 "33pF" CAPC1608X90N 6810,3840 r270 top
C67 "100nF" CAPC1608X90N 6810,3960 r270 top
C68 "10uF" CAPC1608X90N 5740,3798.74 r0 top
C69 "100nF" CAPC1608X90N 5740,3738.74 r0 top
C70 "10uF" CAPC1608X90N 5890,3738.74 r180 top
C71 "100nF" CAPC1608X90N 5890,3798.74 r180 top
C72 "100pF" CAPC1608X90N 3241.26,1890 r180 top
C73 "10nF" CAPC1608X90N 2745.28,3350 r180 top
C74 "10nF" CAPC1608X90N 3211.26,1240 r180 top
C75 "100nF" CAPC1608X90N 3316.26,3600 r90 top
C76 "100nF" CAPC1608X90N 3661.26,1490 r90 top
C77 "C0603" CAPC1608X90N 860,910 r180 top
C78 "10nF" CAPC1608X90N 3731.26,3350 r0 top
C79 "10nF" CAPC1608X90N 3941.26,1240 r0 top
C80 "10nF" CAPC1608X90N 3611.26,3350 r180 top
C81 "100pF" CAPC1608X90N 3401.26,3970 r90 top
C82 "100pF" CAPC1608X90N 3831.26,1890 r180 top
C83 "10nF" CAPC1608X90N 3491.26,3350 r0 top
C84 "10nF" CAPC1608X90N 3801.26,1240 r180 top
C85 "10nF" CAPC1608X90N 3371.26,3350 r180 top
C86 "100nF" CAPC1608X90N 6810,4570 r90 top
C87 "100nF" CAPC1608X90N 6390,4570 r90 top
C88 "100nF" CAPC1608X90N 6450,2475 r270 top
C89 "100nF" CAPC1608X90N 6450,2740 r270 top
C90 "NC" CAPC1608X90N 6770,1015 r90 top
C91 "NC" CAPC1608X90N 6950,1015 r90 top
C92 "100nF" CAPC1608X90N 6830,1465 r180 top
C93 "100nF" CAPC1608X90N 6830,1520 r180 top
C94 "100nF" CAPC1608X90N 6030,1980 r90 top
C95 "100nF" CAPC1608X90N 6270,1980 r270 top
C96 "100nF" CAPC1608X90N 6980,1785 r180 top
C97 "33pF" CAPC1608X90N 6980,1965 r0 top
C98 "33pF" CAPC1608X90N 6980,1845 r0 top
C99 "33pF" CAPC1608X90N 6980,1905 r0 top
C100 "100nF" CAPC1608X90N 4675,1170 r180 top
C101 "100nF" CAPC1608X90N 4595,1320 r270 top
C102 "100nF" CAPC1608X90N 5775,1170 r180 top
C103 "100nF" CAPC1608X90N 5695,1320 r270 top
C104 "100nF" CAPC1608X90N 5500,1170 r180 top
C105 "100nF" CAPC1608X90N 5420,1320 r270 top
C106 "100nF" CAPC1608X90N 4950,1170 r180 top
C107 "100nF" CAPC1608X90N 4870,1320 r270 top
C108 "100nF" CAPC1608X90N 4400,1170 r180 top
C109 "100nF" CAPC1608X90N 4320,1320 r270 top
C110 "100nF" CAPC1608X90N 5225,1170 r180 top
C111 "100nF" CAPC1608X90N 5145,1320 r270 top
CARD1 "SMN-303" SIM-SMD_SMN-303 7060,1775 r270 bottom
CN1 "XT60-NOMAL" AMASS_XT60_NOMAL 5270,4570 r180 top
CN2 "XT60-NOMAL" AMASS_XT60_NOMAL 5955,4570 r180 top
CN3 "ZX-XH2.54-3PZZ" CONN-TH_3P-P2.54_2501S-3P 690,4630 r180 top
CN4 "ZX-XH2.54-3PZZ" CONN-TH_3P-P2.54_2501S-3P 1115,4629.99 r180 top
D1 "SMAJ58CA" DIOM5026X229N 1251.26,3600 r90 top
D2 "SS54B" DIOM5336X244N 1240,2080 r90 top
D3 "B540C-13-F" DIOM7959X250N 1017.7,2780 r0 top
D4 "SMAJ58CA" DIOM5026X229N 1191.26,1490 r90 top
D5 "BAS21,215" BAS21215 1140.28,3970 r90 top
D6 "BAS21,215" BAS21215 1041.26,1860 r90 top
D7 "M7" DIOM5127X250N 370,1360 r180 top
D8 "SMAJ28CA" DIONM5226X262N 370,1230 r0 top
D9 "SS54B" DIOM5336X244N 1865,2080.35 r90 top
D10 "B540C-13-F" DIOM7959X250N 1647.7,2780 r0 top
D11 "SS34A" DIOM5026X262N 5075,4220 r180 top
D12 "SMAJ58CA" DIOM5026X229N 1781.26,1490 r90 top
D13 "SMAJ58CA" DIOM5026X229N 1883.76,3600 r90 top
D14 "BAS21,215" BAS21215 1631.26,1860 r90 top
D15 "SS54B" DIOM5336X244N 2505,2080.35 r90 top
D16 "B540C-13-F" DIOM7959X250N 2277.7,2780 r0 top
D17 "BAS21,215" BAS21215 1770.28,3970 r90 top
D18 "SMAJ58CA" DIOM5026X229N 2361.26,1490 r90 top
D19 "SS54B" DIOM5336X244N 3145,2080.35 r90 top
D20 "B540C-13-F" DIOM7959X250N 2917.7,2780 r0 top
D21 "BAS21,215" BAS21215 2211.26,1860 r90 top
D22 "SMAJ58CA" DIOM5026X229N 2516.26,3600 r90 top
D23 "BAS21,215" BAS21215 2400.28,3970 r90 top
D24 "SS54B" DIOM5336X244N 3775,2080.35 r90 top
D25 "B540C-13-F" DIOM7959X250N 3547.7,2780 r0 top
D26 "SMAJ58CA" DIOM5026X229N 2941.26,1490 r90 top
D27 "BAS21,215" BAS21215 2791.26,1860 r90 top
D28 "SMAJ58CA" DIOM5026X229N 3148.76,3600 r90 top
D29 "BAS21,215" BAS21215 3041.26,3970 r90 top
D30 "SMAJ58CA" DIOM5026X229N 3541.26,1490 r90 top
D31 "B540C-13-F" DIOM7959X250N 4710,3925 r90 top
D32 "BAS21,215" BAS21215 3391.26,1860 r90 top
D33 "SMAJ58CA" DIOM5026X229N 3781.26,3600 r90 top
D34 "SMAJ58CA" DIOM5026X229N 4131.26,1490 r90 top
D35 "BAS21,215" BAS21215 3671.26,3970 r90 top
D36 "BAS21,215" BAS21215 3981.26,1860 r90 top
D37 "WS4.5D3HV" WS45D3HV 6830,1580 r180 top
D38 "SRV05-4.TCT" SOT95P280X145-6N 7010,2060 r0 top
E1 "CESD5V0D3 ZA" SOD-323_L1.8-W1.3-LS2.5-RD 5405,3745 r180 top
E2 "CESD3V3D3 YU" SOD-323_L1.8-W1.3-LS2.5-RD 5595,3745 r180 top
E3 "CESD3V3D3 YU" SOD-323_L1.8-W1.3-LS2.5-RD 6960,4570 r90 top
E4 "CESD3V3D3 YU" SOD-323_L1.8-W1.3-LS2.5-RD 6540,4570 r90 top
E5 "CESD3V3D3 YU" SOD-323_L1.8-W1.3-LS2.5-RD 6880,4570 r270 top
E6 "CESD3V3D3 YU" SOD-323_L1.8-W1.3-LS2.5-RD 6460,4570 r270 top
F1 "nSMD012" RESC3116X65N 6075,975 r270 top
F2 "nSMD012" RESC3116X65N 5975,975 r270 top
F3 "JK-nSMD050-30" RESC3116X65N 5595,4092.91 r270 top
F4 "JK-nSMD050-30" RESC3116X65N 5595,3892.91 r270 top
FU1 "XF-506P" XF-506P 304.98,4364.96 r270 top
FU2 "XF-506P" XF-506P 4585.67,4685.02 r180 top
IC1 "TPS5450DDAR" SOIC127P600X170-9N 1021.26,3080 r90 top
IC2 "TPS5450DDAR" SOIC127P600X170-9N 1653.76,3080 r90 top
IC3 "BTT60502ERAXUMA1" SOIC127P600X115-15N 935.15,1489.37 r270 top
IC4 "BTT62004ESAXUMA1" SOP65P600X115-25N 997.72,3600 r270 top
IC5 "TPS5450DDAR" SOIC127P600X170-9N 2286.26,3080 r90 top
IC6 "BTT60502ERAXUMA1" SOIC127P600X115-15N 1521.26,1489.37 r270 top
IC7 "BTT62004ESAXUMA1" SOP65P600X115-25N 1629.85,3600 r270 top
IC8 "TPS5450DDAR" SOIC127P600X170-9N 2918.76,3080 r90 top
IC9 "BTT60502ERAXUMA1" SOIC127P600X115-15N 2101.26,1489.37 r270 top
IC10 "TPS5450DDAR" SOIC127P600X170-9N 3551.26,3080 r90 top
IC11 "BTT62004ESAXUMA1" SOP65P600X115-25N 2261.99,3600 r270 top
IC12 "BTT60502ERAXUMA1" SOIC127P600X115-15N 2681.26,1489.37 r270 top
IC13 "AMS1117-3.3" SOT229P700X180-4N 5810,4000 r90 top
IC14 "TPS5450DDAR" SOIC127P600X170-9N 4390,3910 r180 top
IC15 "MIC29302WU" MIC29302WU 6582.76,3944.19 r90 top
IC16 "BTT62004ESAXUMA1" SOP65P600X115-25N 2894.12,3600 r270 top
IC17 "BTT60502ERAXUMA1" SOIC127P600X115-15N 3281.26,1489.37 r270 top
IC18 "INA199A1DCKR" SOT65P210X110-6N 860,798 r270 top
IC19 "BTT60502ERAXUMA1" SOIC127P600X115-15N 3871.26,1489.37 r270 top
IC20 "BTT62004ESAXUMA1" SOP65P600X115-25N 3526.26,3600 r270 top
IC21 "2N7002" SOT95P230X110-3N 5575,4240 r0 top
IC22 "TCA9548APWR" SOP65P640X120-24N 5070,2765 r270 top
IC23 "TCA9548APWR" SOP65P640X120-24N 5500,2765 r270 top
IC24 "TJA1042T_3_1J" SOIC127P600X175-8N 6276.3,2740 r180 top
IC25 "TJA1042T_3_1J" SOIC127P600X175-8N 6276.3,2475 r180 top
IC26 "TXS0102DCUR" SOP50P310X90-8N 6150,1980 r0 top
IC27 "AO4805" SOIC127P600X175-8N_AO4805 4675,1525 r270 top
IC28 "AO4805" SOIC127P600X175-8N_AO4805 5775,1525 r270 top
IC29 "TXS0102DCUR" SOP50P310X90-8N 4674.84,1287.99 r90 top
IC30 "TXS0102DCUR" SOP50P310X90-8N 5775,1290 r90 top
IC31 "2N7002" SOT95P230X110-3N 4675,1745 r90 top
IC32 "2N7002" SOT95P230X110-3N 5775,1745 r90 top
IC33 "AO4805" SOIC127P600X175-8N_AO4805 4950,1525 r270 top
IC34 "AO4805" SOIC127P600X175-8N_AO4805 5500,1525 r270 top
IC35 "TXS0102DCUR" SOP50P310X90-8N 5500,1290 r90 top
IC36 "TXS0102DCUR" SOP50P310X90-8N 4950,1290 r90 top
IC37 "2N7002" SOT95P230X110-3N 4950,1745 r90 top
IC38 "2N7002" SOT95P230X110-3N 5500,1745 r90 top
IC39 "AO4805" SOIC127P600X175-8N_AO4805 4400,1525 r270 top
IC40 "AO4805" SOIC127P600X175-8N_AO4805 5225,1525 r270 top
IC41 "TXS0102DCUR" SOP50P310X90-8N 4400,1290 r90 top
IC42 "TXS0102DCUR" SOP50P310X90-8N 5225,1290 r90 top
IC43 "2N7002" SOT95P230X110-3N 4400,1745 r90 top
IC44 "2N7002" SOT95P230X110-3N 5225,1745 r90 top
J1 "JUMP50" JUMP50 3910,2625.12 r90 bottom
J2 "XT60PW-M" AMASS_XT60PW_M 456.22,830.75 r90 top
J3 "JUMP25" JUMP25_Au 972.87,4330 r0 bottom
J4 "JUMP25" JUMP25_Au 2150,4330 r0 bottom
J5 "NC" QM13.2 1180,2787.72 r270 bottom
J6 "QM13.2" QM13.2 1180,2052.28 r270 bottom
J7 "776231-1" 7762311 3260,760 r180 bottom
J8 "JUMP25" JUMP25_Au 305,3230 r270 bottom
J9 "JUMP25" JUMP25_Au 305,1795 r270 bottom
J10 "QM13.2" QM13.2 1075,2052.28 r270 bottom
J11 "NC" QM13.2 1810,2787.72 r90 bottom
J12 "QM13.2" QM13.2 970,2052.28 r270 bottom
J13 "QM13.2" QM13.2 1075,2787.72 r270 bottom
J14 "QM13.2" QM13.2 1810,2052.28 r90 bottom
J15 "QM13.2" QM13.2 865,2052.28 r270 bottom
J16 "QM13.2" QM13.2 970,2787.72 r270 bottom
J17 "JUMP14.5" JUMP14.5 3252.4,3600 r180 bottom
J18 "QM13.2" QM13.2 865,2787.72 r270 bottom
J19 "776228-1" 7762281 5940,760 r180 bottom
J20 "JUMP14.5" JUMP14.5 2567.4,3600 r180 bottom
J21 "JUMP25" JUMP25_Au 520,3227.87 r90 bottom
J22 "JUMP25" JUMP25_Au 972.87,4115 r0 bottom
J23 "JUMP25" JUMP25_Au 2150,4115 r0 bottom
J24 "NC" QM13.2 2440,2787.72 r90 bottom
J25 "QM13.2" QM13.2 2440,2052.28 r90 bottom
J26 "QM13.2" QM13.2 1705,2787.72 r90 bottom
J27 "QM13.2" QM13.2 1600,2787.72 r90 bottom
J28 "QM13.2" QM13.2 1705,2052.28 r90 bottom
J29 "JUMP14.5" JUMP14.5 1882.4,3600 r180 bottom
J30 "NC" QM13.2 3080,2052.28 r90 bottom
J31 "QM13.2" QM13.2 1495,2787.72 r90 bottom
J32 "QM13.2" QM13.2 1600,2052.28 r90 bottom
J33 "排针_P2_2.54" HDRV2W66P0X254_1X2_508X250X880P 7000,3195 r0 top
J34 "排针_P2_2.54" HDRV2W66P0X254_1X2_508X250X880P 7100,3355 r180 top
J35 "QM13.2" QM13.2 3080,2787.72 r270 bottom
J36 "QM13.2" QM13.2 1495,2052.28 r90 bottom
J37 "JUMP14.5" JUMP14.5 1197.4,3600 r180 bottom
J38 "NC" QM13.2 3710,2787.72 r90 bottom
J39 "QM13.2" QM13.2 2335,2787.72 r90 bottom
J40 "QM13.2" QM13.2 3710,2052.28 r90 bottom
J41 "JUMP14.5" JUMP14.5 3807.4,1490 r180 bottom
J42 "QM13.2" QM13.2 2230,2052.28 r270 bottom
J43 "QM13.2" QM13.2 2335,2052.28 r90 bottom
J44 "QM13.2" QM13.2 2125,2787.72 r90 bottom
J45 "QM13.2" QM13.2 2230,2787.72 r270 bottom
J46 "QM13.2" QM13.2 2125,2052.28 r90 bottom
J47 "JUMP14.5" JUMP14.5 3122.4,1490 r180 bottom
J48 "JUMP14.5" JUMP14.5 2437.4,1490 r180 bottom
J49 "QM13.2" QM13.2 2975,2787.72 r90 bottom
J50 "QM13.2" QM13.2 2870,2052.28 r270 bottom
J51 "QM13.2" QM13.2 2975,2052.28 r90 bottom
J52 "QM13.2" QM13.2 2765,2052.28 r270 bottom
J53 "QM13.2" QM13.2 2870,2787.72 r270 bottom
J54 "QM13.2" QM13.2 2765,2787.72 r270 bottom
J55 "JUMP14.5" JUMP14.5 1752.4,1490 r180 bottom
J56 "JUMP14.5" JUMP14.5 1067.4,1490 r180 bottom
J57 "QM13.2" QM13.2 3605,2052.28 r270 bottom
J58 "QM13.2" QM13.2 3500,2787.72 r90 bottom
J59 "QM13.2" QM13.2 3605,2787.72 r270 bottom
J60 "QM13.2" QM13.2 3395,2787.72 r90 bottom
J61 "QM13.2" QM13.2 3500,2052.28 r90 bottom
J62 "QM13.2" QM13.2 3395,2052.28 r90 bottom
J63 "KH-IPEX-SMAKWE" KHIPEXSMAKWE 7190,1040 r180 top
J64 "排针_P2_2.54" HDRV2W66P0X254_1X2_508X250X880P 7100,2200 r180 top
J65 "KH-IPEX-SMAKWE" KHIPEXSMAKWE 7190,630 r180 top
J66 "排针_P2_2.54" HDRV2W66P0X254_1X2_508X250X880P 7000,1465 r0 top
K1 "HF14FW/024-HSTF" HF14FW005HPTF 2823.15,4404.72 r0 top
K2 "HF46F_024-HS1T" HF46F024HS1T 4722.76,4314.96 r180 top
L1 "YSPI1040TP-220M" SDRH104R3R3NT 1027.54,2420 r270 top
L2 "22uH" 磁环电感_卧式 820.55,2520 r270 top
L3 "YSPI1040TP-220M" SDRH104R3R3NT 1657.54,2420 r270 top
L4 "YSPI1040TP-220M" SDRH104R3R3NT 2287.54,2420 r270 top
L5 "YSPI1040TP-220M" SDRH104R3R3NT 2927.54,2420 r270 top
L6 "YSPI1040TP-220M" SDRH104R3R3NT 3557.54,2420 r270 top
L7 "YSPI1040TP-220M" SDRH104R3R3NT 5070,3920 r0 top
LED1 "XL-1606UGC" LED-SMD_L1.7-W1.1-R-RD_GREEN 4840,160 r180 top
LED2 "XL-1606UGC" LED-SMD_L1.7-W1.1-R-RD_GREEN 5000,160 r180 top
LED3 "XL-1606UGC" LED-SMD_L1.7-W1.1-R-RD_GREEN 5785,160 r180 top
LED4 "XL-1606UGC" LED-SMD_L1.7-W1.1-R-RD_GREEN 5945,160 r180 top
Q1 "BSS138P,215" SOT95P230X110-3N 4220,4095 r180 top
Q2 "4409" SOP-8_L4.9-W3.8-P1.27-LS6.0-BL 5820,4280 r270 top
R1 "20K" RESC1608X55N 1160,3020 r90 top
R2 "10K" RESC1608X55N 1245.28,3818.5 r270 top
R3 "47K" RESC1608X55N 1201.26,3410 r0 top
R4 "27Ω" RESC1608X55N 1185.28,3818.5 r270 top
R5 "27Ω" RESC1608X55N 1081.26,1710 r270 top
R6 "10K" RESC1608X55N 1125.28,3818.5 r270 top
R7 "2.26K" RESC1608X55N 1160,3140 r270 top
R8 "10K" RESC1608X55N 1021.26,1710 r270 top
R9 "10K" RESC1608X55N 1065.28,3818.5 r270 top
R10 "10K" RESC1608X55N 961.26,1710 r270 top
R11 "47K" RESC1608X55N 1011.26,1300 r0 top
R12 "10K" RESC1608X55N 960.28,4000 r0 top
R13 "47K" RESC1608X55N 1081.26,3410 r180 top
R14 "10K" RESC1608X55N 891.26,1830 r0 top
R15 "10K" RESC1608X55N 990.28,3818.5 r270 top
R16 "10K" RESC1608X55N 841.26,1710 r270 top
R17 "650Ω" RESC1608X55N 960.28,3940 r180 top
R18 "10K" RESC1608X55N 930.28,3818.5 r270 top
R19 "650Ω" RESC1608X55N 901.26,1710 r90 top
R20 "10K" RESC1608X55N 781.26,1710 r270 top
R21 "10K" RESC1608X55N 870.28,3818.5 r270 top
R22 "47K" RESC1608X55N 961.26,3410 r0 top
R23 "47K" RESC1608X55N 861.26,1300 r180 top
R24 "10K" RESC1608X55N 810.28,3818.5 r270 top
R25 "47K" RESC1608X55N 841.26,3410 r180 top
R26 "20K" RESC1608X55N 1795,3021.5 r90 top
R27 "2.26K" RESC1608X55N 1795,3140 r270 top
R28 "10K" RESC1608X55N 4355,4125 r180 top
R29 "27Ω" RESC1608X55N 1671.26,1710 r270 top
R30 "10K" RESC1608X55N 1611.26,1710 r270 top
R31 "10K" RESC1608X55N 1551.26,1710 r270 top
R32 "47K" RESC1608X55N 1591.26,1300 r0 top
R33 "10K" RESC1608X55N 1870.28,3818.5 r270 top
R34 "10K" RESC1608X55N 1481.26,1830 r0 top
R35 "47K" RESC1608X55N 1831.26,3410 r0 top
R36 "10K" RESC1608X55N 1431.26,1710 r270 top
R37 "27Ω" RESC1608X55N 1810.28,3818.5 r270 top
R38 "20K" RESC1608X55N 2425,3020 r90 top
R39 "650Ω" RESC1608X55N 1491.26,1710 r90 top
R40 "10K" RESC1608X55N 1371.26,1710 r270 top
R41 "10K" RESC1608X55N 1750.28,3818.5 r270 top
R42 "47K" RESC1608X55N 1451.26,1300 r180 top
R43 "10K" RESC1608X55N 1690.28,3818.5 r270 top
R44 "10K" RESC1608X55N 1590.28,4000 r0 top
R45 "47K" RESC1608X55N 1711.26,3410 r180 top
R46 "10K" RESC1608X55N 1620.28,3818.5 r270 top
R47 "3.6K" RESC1608X55N 2425,3140 r270 top
R48 "650Ω" RESC1608X55N 1590.28,3940 r180 top
R49 "10K" RESC1608X55N 1560.28,3818.5 r270 top
R50 "10K" RESC1608X55N 1500.28,3818.5 r270 top
R51 "47K" RESC1608X55N 1591.26,3410 r0 top
R52 "10K" RESC1608X55N 1440.28,3818.5 r270 top
R53 "47K" RESC1608X55N 1471.26,3410 r180 top
R54 "20K" RESC1608X55N 3060,3020 r90 top
R55 "27Ω" RESC1608X55N 2251.26,1710 r270 top
R56 "10K" RESC1608X55N 2191.26,1710 r270 top
R57 "10K" RESC1608X55N 2131.26,1710 r270 top
R58 "47K" RESC1608X55N 2171.26,1300 r0 top
R59 "10K" RESC1608X55N 2061.26,1830 r0 top
R60 "6.34K" RESC1608X55N 3060,3140 r270 top
R61 "10K" RESC1608X55N 2011.26,1710 r270 top
R62 "650Ω" RESC1608X55N 2071.26,1710 r90 top
R63 "10K" RESC1608X55N 1951.26,1710 r270 top
R64 "47K" RESC1608X55N 2031.26,1300 r180 top
R65 "10K" RESC1608X55N 2500.28,3818.5 r270 top
R66 "47K" RESC1608X55N 2461.26,3410 r0 top
R67 "27Ω" RESC1608X55N 2440.28,3818.5 r270 top
R68 "10K" RESC1608X55N 2380.28,3818.5 r270 top
R69 "10K" RESC1608X55N 2320.28,3818.5 r270 top
R70 "10K" RESC1608X55N 2221.26,4000 r0 top
R71 "47K" RESC1608X55N 2341.26,3410 r180 top
R72 "20K" RESC1608X55N 3690,3020 r90 top
R73 "10K" RESC1608X55N 2250.28,3818.5 r270 top
R74 "650Ω" RESC1608X55N 2221.26,3940 r180 top
R75 "10K" RESC1608X55N 2190.28,3818.5 r270 top
R76 "10K" RESC1608X55N 2130.28,3818.5 r270 top
R77 "47K" RESC1608X55N 2219.76,3410 r0 top
R78 "10K" RESC1608X55N 2070.28,3818.5 r270 top
R79 "6.34K" RESC1608X55N 3690,3140 r270 top
R80 "27Ω" RESC1608X55N 2831.26,1710 r270 top
R81 "10K" RESC1608X55N 2771.26,1710 r270 top
R82 "47K" RESC1608X55N 2101.26,3410 r180 top
R83 "10K" RESC1608X55N 2711.26,1710 r270 top
R84 "47K" RESC1608X55N 2751.26,1300 r0 top
R85 "10K" RESC1608X55N 2641.26,1830 r0 top
R86 "10K" RESC1608X55N 2591.26,1710 r270 top
R87 "650Ω" RESC1608X55N 2651.26,1710 r90 top
R88 "10K" RESC1608X55N 2531.26,1710 r270 top
R89 "47K" RESC1608X55N 2611.26,1300 r180 top
R90 "10K" RESC1608X55N 3140.28,3818.5 r270 top
R91 "47K" RESC1608X55N 3101.26,3410 r0 top
R92 "27Ω" RESC1608X55N 3080.28,3818.5 r270 top
R93 "10K" RESC1608X55N 3020.28,3818.5 r270 top
R94 "20K" RESC1608X55N 4475,4060 r180 top
R95 "10K" RESC1608X55N 2960.28,3818.5 r270 top
R96 "10K" RESC1608X55N 2861.26,4000 r0 top
R97 "47K" RESC1608X55N 2982.76,3410 r180 top
R98 "10K" RESC1608X55N 2885.28,3818.5 r270 top
R99 "27Ω" RESC1608X55N 3431.26,1710 r270 top
R100 "650Ω" RESC1608X55N 2861.26,3940 r180 top
R101 "10K" RESC1608X55N 2825.28,3818.5 r270 top
R102 "10K" RESC1608X55N 3371.26,1710 r270 top
R103 "6.34K" RESC1608X55N 4355,4060 r0 top
R104 "10K" RESC1608X55N 2765.28,3818.5 r270 top
R105 "47K" RESC1608X55N 2861.26,3410 r0 top
R106 "10K" RESC1608X55N 3311.26,1710 r270 top
R107 "47K" RESC1608X55N 3351.26,1300 r0 top
R108 "100K" RESC1608X55N 6755,3960 r90 top
R109 "10K" RESC1608X55N 2705.28,3818.5 r270 top
R110 "10K" RESC1608X55N 3241.26,1830 r0 top
R111 "10K" RESC1608X55N 3191.26,1710 r270 top
R112 "650Ω" RESC1608X55N 3251.26,1710 r90 top
R113 "10K" RESC1608X55N 3131.26,1710 r270 top
R114 "47K" RESC1608X55N 6780,4055 r180 top
R115 "47K" RESC1608X55N 2741.26,3410 r180 top
R116 "47K" RESC1608X55N 3211.26,1300 r180 top
R117 "10Ω" RESC1608X55N 775,875 r90 top
R118 "10K" RESC1608X55N 760,4455 r0 top
R119 "10K" RESC1608X55N 1185,4455 r0 top
R120 "3mΩ" RESC6432X06N__2512RES 651,804 r90 bottom
R121 "10K" RESC1608X55N 3770.28,3818.5 r270 top
R122 "10Ω" RESC1608X55N 775,730 r270 top
R123 "47K" RESC1608X55N 3731.26,3410 r0 top
R124 "27Ω" RESC1608X55N 3710.28,3818.5 r270 top
R125 "27Ω" RESC1608X55N 4021.26,1710 r270 top
R126 "10K" RESC1608X55N 3650.28,3818.5 r270 top
R127 "10K" RESC1608X55N 3961.26,1710 r270 top
R128 "10K" RESC1608X55N 3590.28,3818.5 r270 top
R129 "10K" RESC1608X55N 3901.26,1710 r270 top
R130 "47K" RESC1608X55N 3941.26,1300 r0 top
R131 "10K" RESC1608X55N 3491.26,4000 r0 top
R132 "47K" RESC1608X55N 3611.26,3410 r180 top
R133 "10K" RESC1608X55N 3831.26,1830 r0 top
R134 "10K" RESC1608X55N 3515.28,3818.5 r270 top
R135 "10K" RESC1608X55N 3781.26,1710 r270 top
R136 "R0603" RESC1608X55N 4880,1980 r90 top
R137 "R0603" RESC1608X55N 4940,1980 r270 top
R138 "650Ω" RESC1608X55N 3491.26,3940 r180 top
R139 "10K" RESC1608X55N 3455.28,3818.5 r270 top
R140 "650Ω" RESC1608X55N 3841.26,1710 r90 top
R141 "10K" RESC1608X55N 3721.26,1710 r270 top
R142 "10K" RESC1608X55N 3395.28,3818.5 r270 top
R143 "47K" RESC1608X55N 3491.26,3410 r0 top
R144 "47K" RESC1608X55N 3801.26,1300 r180 top
R145 "10K" RESC1608X55N 3335.28,3818.5 r270 top
R146 "R0603" RESC1608X55N 5580,4345 r180 top
R147 "R0603" RESC1608X55N 4760,1980 r90 top
R148 "R0603" RESC1608X55N 4820,1980 r270 top
R149 "47K" RESC1608X55N 3371.26,3410 r180 top
R150 "75K" RESC1608X55N 6630,4570 r90 top
R151 "15K" RESC1608X55N 6690,4570 r270 top
R152 "20K" RESC1608X55N 6210,4570 r90 top
R153 "20K" RESC1608X55N 6270,4570 r90 top
R154 "R0603" RESC1608X55N 4520,1980 r90 top
R155 "R0603" RESC1608X55N 4580,1980 r270 top
R156 "10K" RESC1608X55N 6750,4570 r90 top
R157 "10K" RESC1608X55N 6330,4570 r90 top
R158 "10K" RESC1608X55N 5455,4235 r270 top
R159 "R0603" RESC1608X55N 4400,1980 r90 top
R160 "R0603" RESC1608X55N 4460,1980 r270 top
R161 "10K" RESC1608X55N 5695,2765 r90 top
R162 "10K" RESC1608X55N 5265,2765 r90 top
R163 "10K" RESC1608X55N 4840,210 r0 top
R164 "120Ω" RESC1608X55N 6095,2475 r270 top
R165 "120Ω" RESC1608X55N 6095,2740 r270 top
R166 "10K" RESC1608X55N 5000,210 r0 top
R167 "0Ω" RESC1608X55N 6860,1040 r0 top
R168 "10K" RESC1608X55N 5785,210 r0 top
R169 "10K" RESC1608X55N 6330,1980 r270 top
R170 "10K" RESC1608X55N 5945,210 r0 top
R171 "0Ω" RESC1608X55N 6525,1980 r270 top
R172 "0Ω" RESC1608X55N 6460,1980 r270 top
R173 "15K" RESC1608X55N 6980,1725 r180 top
R174 "0Ω" RESC1608X55N 6395,1980 r270 top
R175 "51K" RESC1608X55N 6980,1660 r0 top
R176 "4.7K" RESC1608X55N 6985,1560 r0 top
R177 "5.1K" RESC1608X55N 6730,435 r180 top
R178 "5.1K" RESC1608X55N 6915,435 r0 top
R179 "10K" RESC1608X55N 4775,1730 r90 top
R180 "10K" RESC1608X55N 5875,1730 r90 top
R181 "10K" RESC1608X55N 4755,1320 r270 top
R182 "10K" RESC1608X55N 5855,1320 r270 top
R183 "10K" RESC1608X55N 4575,1730 r270 top
R184 "10K" RESC1608X55N 5675,1730 r270 top
R185 "10K" RESC1608X55N 5050,1730 r90 top
R186 "10K" RESC1608X55N 5600,1730 r90 top
R187 "10K" RESC1608X55N 5580,1320 r270 top
R188 "10K" RESC1608X55N 4850,1730 r270 top
R189 "10K" RESC1608X55N 5030,1320 r270 top
R190 "10K" RESC1608X55N 5400,1730 r270 top
R191 "NC" RESC1608X55N 4365,795 r90 top
R192 "NC" RESC1608X55N 4640,1980 r90 top
R193 "NC" RESC1608X55N 4700,1980 r270 top
R194 "NC" RESC1608X55N 4425,795 r90 top
R195 "NC" RESC1608X55N 5000,1980 r90 top
R196 "NC" RESC1608X55N 5060,1980 r270 top
R197 "NC" RESC1608X55N 5330,955 r90 top
R198 "NC" RESC1608X55N 6981.5,2890 r180 top
R199 "NC" RESC1608X55N 6981.5,2950 r0 top
R200 "10K" RESC1608X55N 4500,1730 r90 top
R201 "10K" RESC1608X55N 5325,1730 r90 top
R202 "NC" RESC1608X55N 5065,955 r90 top
R203 "NC" RESC1608X55N 6981.5,2650 r180 top
R204 "NC" RESC1608X55N 6981.5,2710 r0 top
R205 "10K" RESC1608X55N 4480,1318.5 r270 top
R206 "10K" RESC1608X55N 5305,1320 r270 top
R207 "10K" RESC1608X55N 4300,1730 r270 top
R208 "10K" RESC1608X55N 5125,1730 r270 top
R209 "NC" RESC1608X55N 5125,955 r90 top
R210 "NC" RESC1608X55N 6981.5,2770 r180 top
R211 "NC" RESC1608X55N 6981.5,2830 r0 top
R212 "NC" RESC1608X55N 5465,955 r90 top
R213 "NC" RESC1608X55N 6981.5,3010 r180 top
R214 "NC" RESC1608X55N 6981.5,3070 r0 top
SW1 "XKB5858-Z-E" SW-TH_XKB5858-Z-E 5390,250 r180 top
U1 "PHB2.0-02-28PZZ" CONN-TH_28P-P2.00_XUNPU_PHB2.0-02-28PZZ 5289.33,2440.94 r0 bottom
U2 "EC800MCNGA-I05-SGNSA" LCC-109_L17.7-W15.8-P1.10_EC800M-CN 6364.13,1495.43 r270 top
USB1 "TYPE-C 16PIN 2MD(073)" USB-C-SMD_TYPE-C-6PIN-2MD-073 6821.5,235 r0 top

## Footprints (in the part's own frame and the unit in brackets; to place one, negate y for a bottom-side part, rotate by r counter-clockwise, add the part's x,y. Pads: shape width x height; smd on the part's side, far side on the other; paste and mask are expansions set on the pad)
7762281 [mm]
  rect 2.625x2.625 hole 1.75: 1(0,0)
  round 2.625 hole 1.75: 2(4,0) 3(8,0) 4(12,0) 5(16,0) 6(20,0) 7(24,0) 8(28,0) 9(2,-4) 10(6,-4) 11(10,-4) 12(14,-4) 13(18,-4) 14(22,-4) 15(26,-4) 16(0,-8) 17(4,-8) 18(8,-8) 19(12,-8) 20(16,-8) 21(20,-8) 22(24,-8) 23(28,-8)
  round 1 hole 2 unplated: MH1(-9.7,6.8) MH2(37.7,6.8) MH3(39.2,-11.3) MH4(-11.2,-11.3)
  silkscreen extent -17,-18.3 44.4,13.8, body extent -16.4,-20.11 44.4,11.99, height 34
7762311 [mm]
  round 2.775 hole 1.85: 1(0,0) 2(4,0) 3(8,0) 4(12,0) 5(16,0) 6(20,0) 7(24,0) 8(28,0) 9(32,0) 10(36,0) 11(40,0) 12(44,0) 13(2,-4) 14(6,-4) 15(10,-4) 16(14,-4) 17(18,-4) 18(22,-4) 19(26,-4) 20(30,-4) 21(34,-4) 22(38,-4) 23(42,-4) 24(0,-8) 25(4,-8) 26(8,-8) 27(12,-8) 28(16,-8) 29(20,-8) 30(24,-8) 31(28,-8) 32(32,-8) 33(36,-8) 34(40,-8) 35(44,-8)
  round 3 hole 2: MH1(-9.7,6.8) MH2(-11.2,-11.3) MH3(55.2,-11.3) MH4(53.7,6.8)
  silkscreen extent -17.1,-18.3 60.45,13.8, body extent -16.6,-19.88 60.3,12.22, height 34.34
AMASS_XT60_NOMAL [mm]
  round 5.8 hole 4.4 paste-2539.97 mask+0.05: +(7.2,0) -(0,0)
  silkscreen extent -4.2,-4 11.4,4.1, body extent -4.34,-4.01 11.59,4.19, height 37.12
AMASS_XT60PW_M [mm]
  round 2.7 hole 1.8: 3(6.75,6) 4(-6.75,6)
  round 4.05 hole 2.7: +(3.6,0) -(-3.6,0)
  silkscreen extent -7.75,-1.85 7.75,16.35, body extent -7.95,-1.98 7.95,16.3, height 8.44
BAS21215 [mm]
  rect 0.6x0.7 smd: 1(-0.95,-1) 2(0.95,-1) 3(0,1)
  silkscreen extent -1.45,-1.8 1.45,0.65, body extent -1.45,-1.2 1.45,1.2, height 0.95
BTB_0.8MM_60PIN_M [mm] "0.8单槽板对板公母座合高5.0，公座，60PIN"
  rect 1.5x0.5 smd: 1(-2.16,11.6) 2(-2.16,10.8) 3(-2.16,10) 4(-2.16,9.2) 5(-2.16,8.4) 6(-2.16,7.6) 7(-2.16,6.8) 8(-2.16,6) 9(-2.16,5.2) 10(-2.16,4.4) 11(-2.16,3.6) 12(-2.16,2.8) 13(-2.16,2) 14(-2.16,1.2) 15(-2.16,0.4) 16(-2.16,-0.4) 17(-2.16,-1.2) 18(-2.16,-2) 19(-2.16,-2.8) 20(-2.16,-3.6) 21(-2.16,-4.4) 22(-2.16,-5.2) 23(-2.16,-6) 24(-2.16,-6.8) 25(-2.16,-7.6) 26(-2.16,-8.4) 27(-2.16,-9.2) 28(-2.16,-10) 29(-2.16,-10.8) 30(-2.16,-11.6) 31(2.16,-11.6) 32(2.16,-10.8) 33(2.16,-10) 34(2.16,-9.2) 35(2.16,-8.4) 36(2.16,-7.6) 37(2.16,-6.8) 38(2.16,-6) 39(2.16,-5.2) 40(2.16,-4.4) 41(2.16,-3.6) 42(2.16,-2.8) 43(2.16,-2) 44(2.16,-1.2) 45(2.16,-0.4) 46(2.16,0.4) 47(2.16,1.2) 48(2.16,2) 49(2.16,2.8) 50(2.16,3.6) 51(2.16,4.4) 52(2.16,5.2) 53(2.16,6) 54(2.16,6.8) 55(2.16,7.6) 56(2.16,8.4) 57(2.16,9.2) 58(2.16,10) 59(2.16,10.8) 60(2.16,11.6)
  silkscreen extent -2.16,-15 2.16,15, body extent -3,-14.9 3,14.9, height 4.62
CAPC1608X90N [mm]
  rect 0.83x0.94 smd: 1(-0.66,0) 2(0.66,0)
  body extent -0.8,-0.4 0.8,0.4, height 0.9
CAPC2012X95N [mm]
  rect 0.96x1.39 smd: 1(-0.79,0) 2(0.79,0)
  body extent -1,-0.63 1,0.63, height 0.95
CAPPM7344X430N [mm]
  rect 2.3x2.5 smd: 1(-3.1,0) 2(3.1,0)
  silkscreen extent -4.25,-2.17 3.65,2.17, body extent -3.65,-2.17 3.65,2.17, height 4.3
CONN-TH_3P-P2.54_2501S-3P [mm]
  rect 1.6x1.6 hole 1: 1(-2.54,0)
  round 1.6 hole 1: 2(0,0) 3(2.54,0)
  silkscreen extent -4.98,-2.35 5.02,3.35
CONN-TH_28P-P2.00_XUNPU_PHB2.0-02-28PZZ [mm]
  rect 1.4x1.4 hole 0.9: 1(13,-1)
  round 1.4 hole 0.9: 2(13,1) 3(11,-1) 4(11,1) 5(9,-1) 6(9,1) 7(7,-1) 8(7,1) 9(5,-1) 10(5,1) 11(3,-1) 12(3,1) 13(1,-1) 14(1,1) 15(-1,-1) 16(-1,1) 17(-3,-1) 18(-3,1) 19(-5,-1) 20(-5,1) 21(-7,-1) 22(-7,1) 23(-9,-1) 24(-9,1) 25(-11,-1) 26(-11,1) 27(-13,-1) 28(-13,1)
  silkscreen extent -15,-4.38 15,3.65
DIOM5026X229N [mm]
  rect 2.2x1.55 smd: 1(-2.05,0) 2(2.05,0)
  silkscreen extent -2.83,-1.3 2.52,1.3, body extent -2.52,-1.3 2.52,1.3, height 2.29
DIOM5026X262N [mm]
  rect 2.2x1.55 smd: 1(-2.05,0) 2(2.05,0)
  silkscreen extent -2.83,-1.31 2.52,1.31, body extent -2.52,-1.31 2.52,1.31, height 2.62
DIOM5127X250N [mm]
  rect 2.2x1.55 smd: 1(-2.05,0) 2(2.05,0)
  silkscreen extent -2.83,-1.34 2.56,1.34, body extent -2.56,-1.34 2.56,1.34, height 2.5
DIOM5336X244N [mm]
  rect 2.25x2.05 smd: 1(-2.15,0) 2(2.15,0)
  silkscreen extent -3.17,-1.81 2.64,1.81, body extent -2.64,-1.81 2.64,1.81, height 2.44
DIOM7959X250N [mm]
  rect 2.2x3.1 smd: 1(-3.5,0) 2(3.5,0)
  silkscreen extent -4.6,-2.95 3.97,2.95, body extent -3.97,-2.95 3.97,2.95, height 2.5
DIONM5226X262N [mm]
  rect 2.3x1.55 smd: 1(-2.15,0) 2(2.15,0)
  silkscreen extent -2.61,-1.3 2.61,1.3, body extent -2.61,-1.3 2.61,1.3, height 2.31
HDRV2W66P0X254_1X2_508X250X880P [mm]
  rect 1.725x1.725 hole 1.15: 1(0,0)
  round 1.725 hole 1.15: 2(2.54,0)
  silkscreen extent -1.52,-1.35 4.06,1.35, body extent -1.27,-1.25 3.81,1.25, height 8.8
HF14FW005HPTF [mm]
  rect 2.25x2.25 hole 1.5: 1(0,0)
  round 2.25 hole 1.5: 2(0,7.5) 3(5,0) 4(5,7.5)
  round 1.95 hole 1.3: 5(25,0) 6(25,7.5)
  silkscreen extent -2.6,-2.75 27,10.25, body extent -2,-2.75 27,10.25, height 26.6
HF46F024HS1T [mm]
  round 1.65 hole 1.1: 1(0,-4.7) 2(0,0) 3(11.5,-4.7) 4(18.5,-4.7)
  silkscreen extent -2,-5.85 19.45,1.15, body extent -1.05,-5.85 19.45,1.15, height 15.7
JUMP14.5 [mm]
  rect 2x2.4 smd: 1(-7.3,0) 2(7.3,0)
  silkscreen extent -5.84,-1.02 5.84,1.02
JUMP25_Au [mm]
  rect 4x4.4 smd: 1(-12.5,0) 2(12.5,0)
  silkscreen extent -10.03,-2.03 10.03,2.03
JUMP50 [mm]
  rect 4x5.4 smd: 1(-24,0) 2(24,0)
  silkscreen extent -21.59,-2.54 21.59,2.54